# EAGLE board SparkFun_Qwiic_Barometer_LPS28DFW-Panel (EAGLE 9.6.2), part 1 of 3
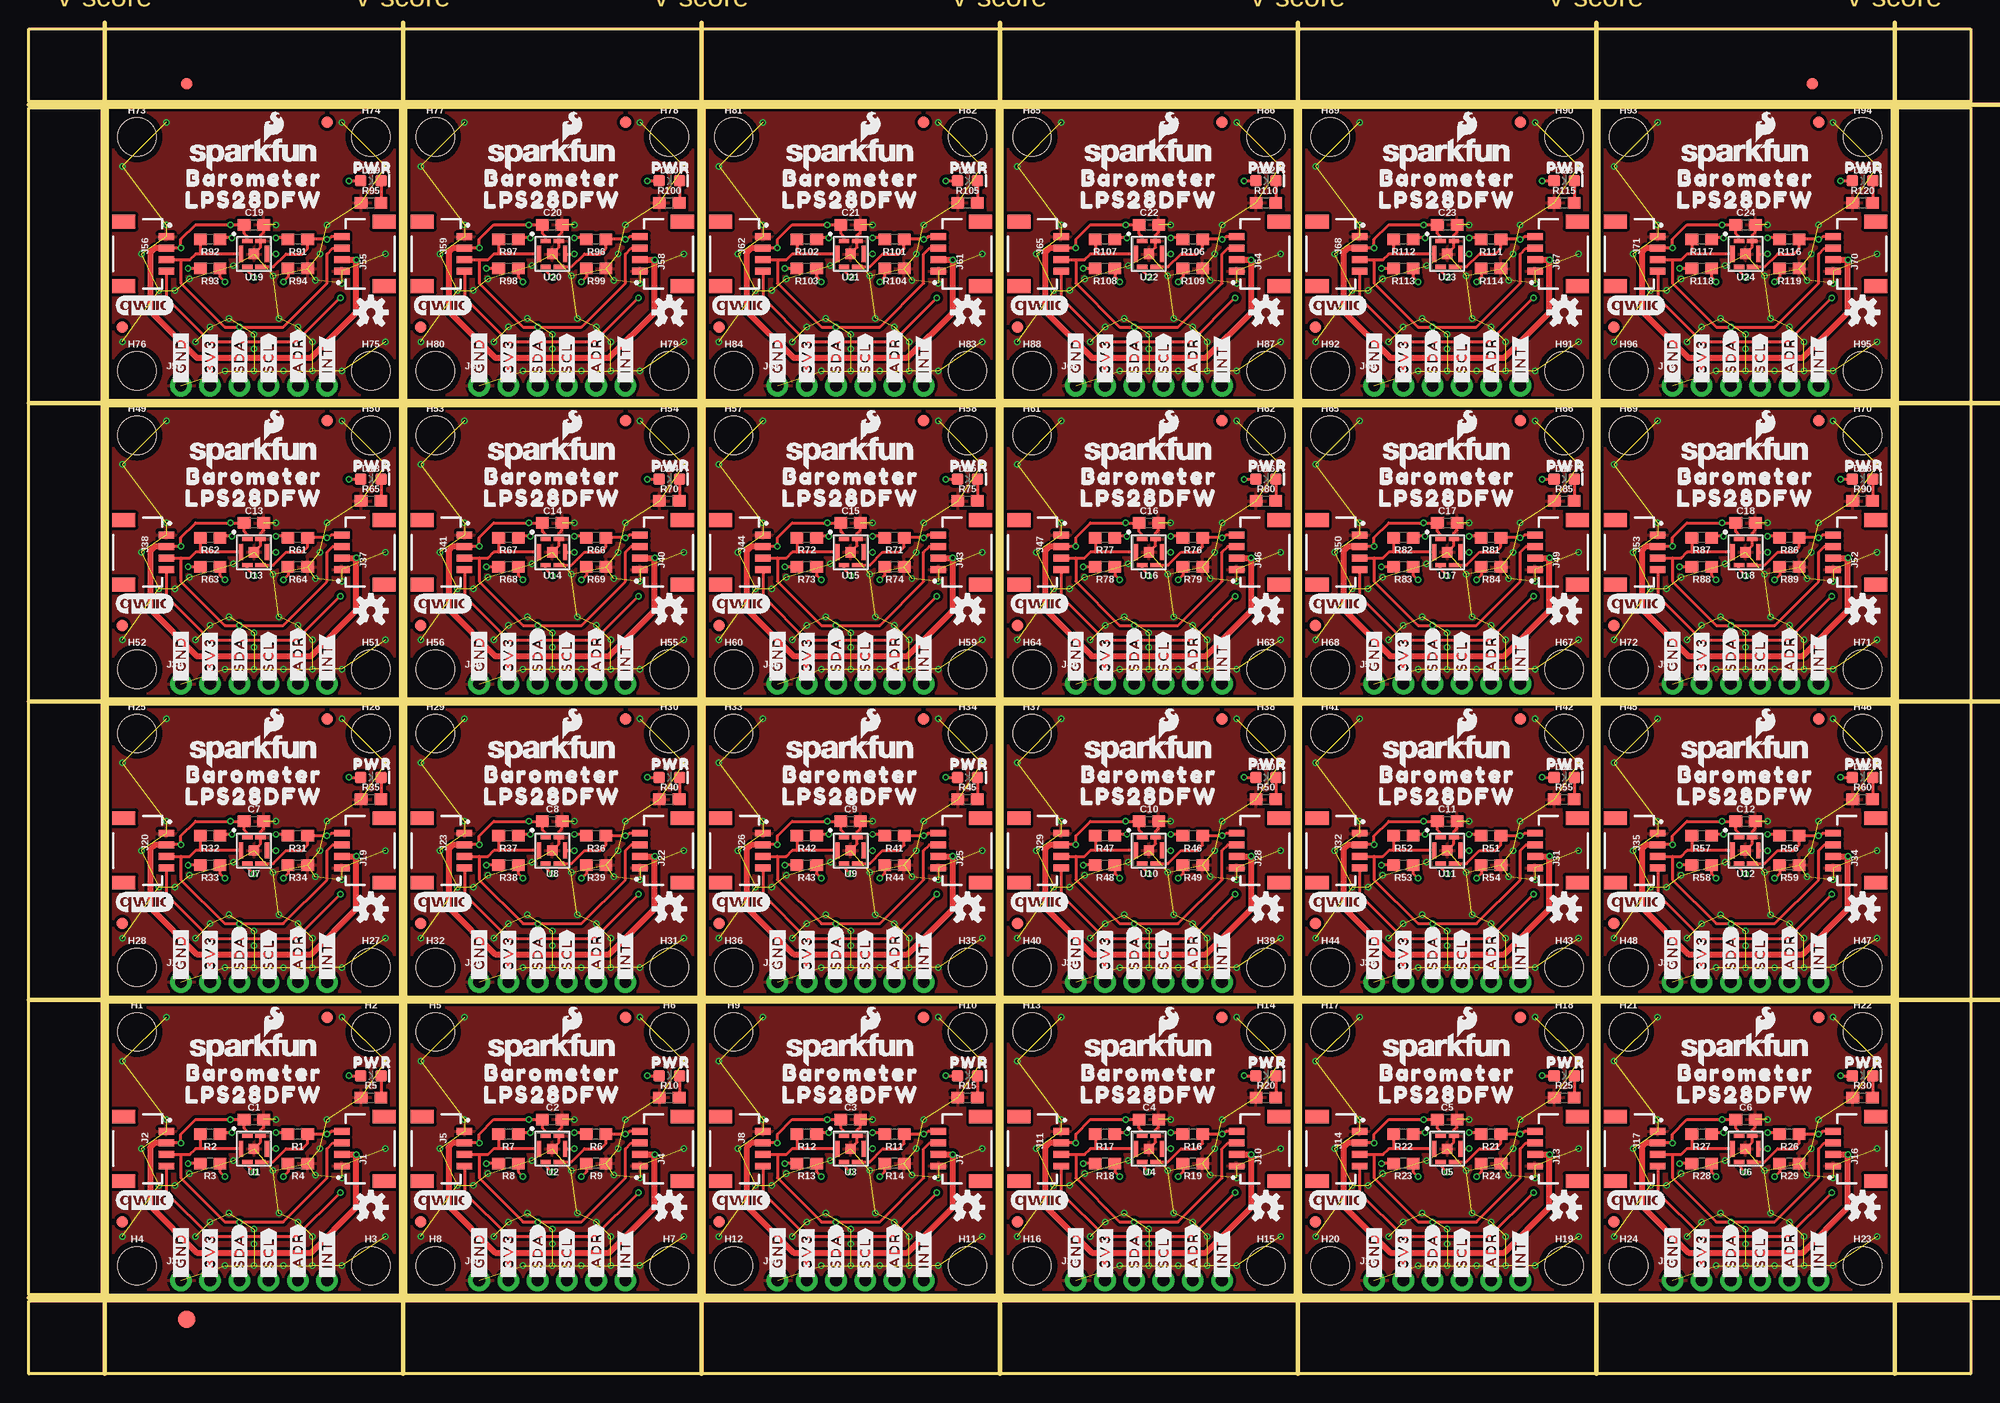
[diagram p0: board, top side]
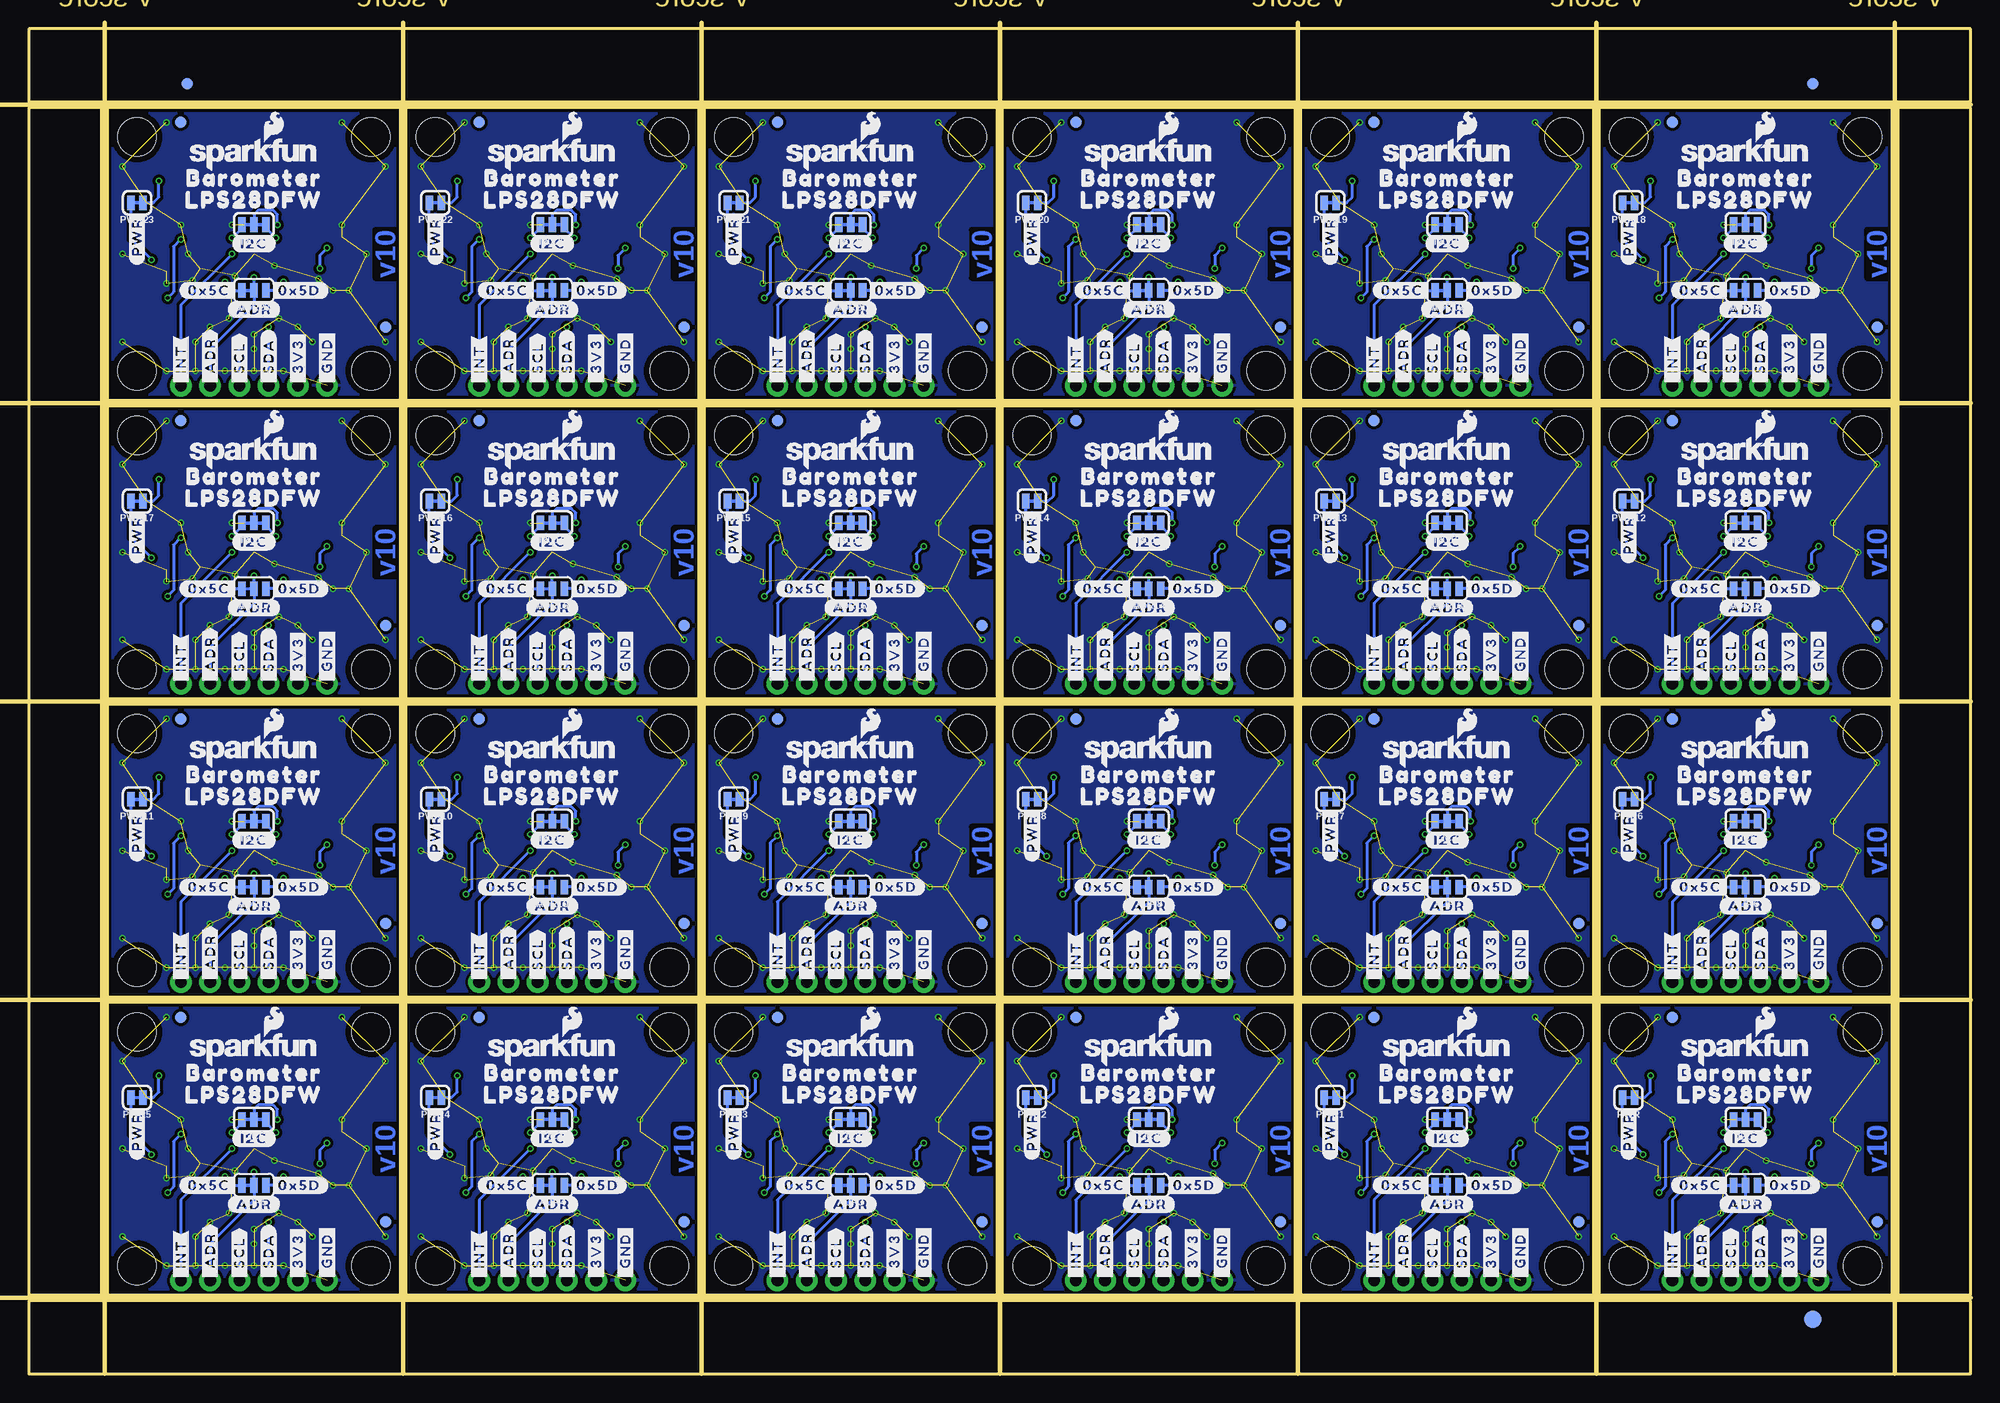
[diagram p1: board, bottom side, seen from below]

Size 168.66 x 116.84 mm. Coordinates in mm from the lower left corner, seen from the top.
Outline: 6.86,6.86 32.26,6.86 32.26,32.26 6.86,32.26 6.86,6.86
Outline: 32.77,6.86 58.17,6.86 58.17,32.26 32.77,32.26 32.77,6.86
Outline: 58.67,6.86 84.07,6.86 84.07,32.26 58.67,32.26 58.67,6.86
Outline: 84.58,6.86 109.98,6.86 109.98,32.26 84.58,32.26 84.58,6.86
Outline: 110.49,6.86 135.89,6.86 135.89,32.26 110.49,32.26 110.49,6.86
Outline: 136.4,6.86 161.8,6.86 161.8,32.26 136.4,32.26 136.4,6.86
Outline: 6.86,32.77 32.26,32.77 32.26,58.17 6.86,58.17 6.86,32.77
Outline: 32.77,32.77 58.17,32.77 58.17,58.17 32.77,58.17 32.77,32.77
Outline: 58.67,32.77 84.07,32.77 84.07,58.17 58.67,58.17 58.67,32.77
Outline: 84.58,32.77 109.98,32.77 109.98,58.17 84.58,58.17 84.58,32.77
Outline: 110.49,32.77 135.89,32.77 135.89,58.17 110.49,58.17 110.49,32.77
Outline: 136.4,32.77 161.8,32.77 161.8,58.17 136.4,58.17 136.4,32.77
Outline: 6.86,58.67 32.26,58.67 32.26,84.07 6.86,84.07 6.86,58.67
Outline: 32.77,58.67 58.17,58.67 58.17,84.07 32.77,84.07 32.77,58.67
Outline: 58.67,58.67 84.07,58.67 84.07,84.07 58.67,84.07 58.67,58.67
Outline: 84.58,58.67 109.98,58.67 109.98,84.07 84.58,84.07 84.58,58.67
Outline: 110.49,58.67 135.89,58.67 135.89,84.07 110.49,84.07 110.49,58.67
Outline: 136.4,58.67 161.8,58.67 161.8,84.07 136.4,84.07 136.4,58.67
Outline: 6.86,84.58 32.26,84.58 32.26,109.98 6.86,109.98 6.86,84.58
Outline: 32.77,84.58 58.17,84.58 58.17,109.98 32.77,109.98 32.77,84.58
Outline: 58.67,84.58 84.07,84.58 84.07,109.98 58.67,109.98 58.67,84.58
Outline: 84.58,84.58 109.98,84.58 109.98,109.98 84.58,109.98 84.58,84.58
Outline: 110.49,84.58 135.89,84.58 135.89,109.98 110.49,109.98 110.49,84.58
Outline: 136.4,84.58 161.8,84.58 161.8,109.98 136.4,109.98 136.4,84.58
Outline: 0,6.35 168.66,6.35 168.66,0 0,0 0,6.35
Outline: 162.31,109.98 168.66,109.98 168.66,6.86 162.31,6.86 162.31,109.98
Outline: 0,116.84 168.66,116.84 168.66,110.49 0,110.49 0,116.84
Outline: 0,109.98 6.35,109.98 6.35,6.86 0,6.86 0,109.98
Copper layers (1*16): Top 0.035mm / dielectric 1.5mm / Bottom 0.035mm
Design rules "SparkFun_Qwiic_Barometer_LPS28DFW": minimum track width 5mil, minimum drill 0.3mm, track to track 5mil, track to pad 5mil, pad to pad 5mil, via to via 5mil, smd to smd 5mil, copper to edge 7mil, drill to drill 7mil, minimum pad ring 5mil, minimum via ring 5mil, stop-mask expansion 2.5mil, vias tented up to drill 25mil, thermal gap 10mil
Milling: 12 lines

## Footprints (pad centres in the part's own frame; a part is rotated, then mirrored left to right if it is on the bottom)
SMT-JUMPER_3_1-NC_TRACE_SILK = smd 0.66 x 1.27: 1 -1.041,0; 2 0,0; 3 1.041,0
0603 = smd 1.1 x 1: 1 -0.85,0; 2 0.85,0
LED-0603 = smd 1 x 1: A -0.877,0; C 0.877,0
FIDUCIAL-1X2 = smd 1 x 1: 1 0,0
FIDUCIAL-1.5X3 = smd 1.5 x 1.5: 1 0,0
STAND-OFF = hole 3.302: 0,0
SMT-JUMPER_3_2-NC_TRACE_SILK = smd 0.66 x 1.27: 1 -1.041,0; 2 0,0; 3 1.041,0
JST04_1MM_RA = smd 0.6 x 1.35: 1 -1.5,0; 2 -0.5,0; 3 0.5,0; 4 1.5,0 | smd 1.2 x 2: NC1 2.8,-3.675; NC2 -2.8,-3.675
1X06_NO_SILK = drill 1.016 pad 1.88: 1 0,0; 2 2.54,0; 3 5.08,0; 4 7.62,0; 5 10.16,0; 6 12.7,0
SMT-JUMPER_2_NC_TRACE_SILK = smd 0.66 x 1.27: 1 -0.521,0; 2 0.521,0
LPS28DFW = smd 0.35 x 1.4: 1 1.125,0; 4 -1.125,0 | smd 0.9 x 0.35: 2 0.575,1.125; 3 -0.575,1.125; 5 -0.575,-1.125; 6 0.575,-1.125 | smd 0.9 x 0.9: 7 0,0

## Placement (x,y rotation side)
ADR  JUMPER-SMT_3_1-NC_TRACE_SILK  [SMT-JUMPER_3_1-NC_TRACE_SILK]  19.56,16.38 180 bottom
ADR1  JUMPER-SMT_3_1-NC_TRACE_SILK  [SMT-JUMPER_3_1-NC_TRACE_SILK]  45.47,16.38 180 bottom
ADR2  JUMPER-SMT_3_1-NC_TRACE_SILK  [SMT-JUMPER_3_1-NC_TRACE_SILK]  71.37,16.38 180 bottom
ADR3  JUMPER-SMT_3_1-NC_TRACE_SILK  [SMT-JUMPER_3_1-NC_TRACE_SILK]  97.28,16.38 180 bottom
ADR4  JUMPER-SMT_3_1-NC_TRACE_SILK  [SMT-JUMPER_3_1-NC_TRACE_SILK]  123.19,16.38 180 bottom
ADR5  JUMPER-SMT_3_1-NC_TRACE_SILK  [SMT-JUMPER_3_1-NC_TRACE_SILK]  149.1,16.38 180 bottom
ADR6  JUMPER-SMT_3_1-NC_TRACE_SILK  [SMT-JUMPER_3_1-NC_TRACE_SILK]  19.56,42.29 180 bottom
ADR7  JUMPER-SMT_3_1-NC_TRACE_SILK  [SMT-JUMPER_3_1-NC_TRACE_SILK]  45.47,42.29 180 bottom
ADR8  JUMPER-SMT_3_1-NC_TRACE_SILK  [SMT-JUMPER_3_1-NC_TRACE_SILK]  71.37,42.29 180 bottom
ADR9  JUMPER-SMT_3_1-NC_TRACE_SILK  [SMT-JUMPER_3_1-NC_TRACE_SILK]  97.28,42.29 180 bottom
ADR10  JUMPER-SMT_3_1-NC_TRACE_SILK  [SMT-JUMPER_3_1-NC_TRACE_SILK]  123.19,42.29 180 bottom
ADR11  JUMPER-SMT_3_1-NC_TRACE_SILK  [SMT-JUMPER_3_1-NC_TRACE_SILK]  149.1,42.29 180 bottom
ADR12  JUMPER-SMT_3_1-NC_TRACE_SILK  [SMT-JUMPER_3_1-NC_TRACE_SILK]  19.56,68.2 180 bottom
ADR13  JUMPER-SMT_3_1-NC_TRACE_SILK  [SMT-JUMPER_3_1-NC_TRACE_SILK]  45.47,68.2 180 bottom
ADR14  JUMPER-SMT_3_1-NC_TRACE_SILK  [SMT-JUMPER_3_1-NC_TRACE_SILK]  71.37,68.2 180 bottom
ADR15  JUMPER-SMT_3_1-NC_TRACE_SILK  [SMT-JUMPER_3_1-NC_TRACE_SILK]  97.28,68.2 180 bottom
ADR16  JUMPER-SMT_3_1-NC_TRACE_SILK  [SMT-JUMPER_3_1-NC_TRACE_SILK]  123.19,68.2 180 bottom
ADR17  JUMPER-SMT_3_1-NC_TRACE_SILK  [SMT-JUMPER_3_1-NC_TRACE_SILK]  149.1,68.2 180 bottom
ADR18  JUMPER-SMT_3_1-NC_TRACE_SILK  [SMT-JUMPER_3_1-NC_TRACE_SILK]  19.56,94.11 180 bottom
ADR19  JUMPER-SMT_3_1-NC_TRACE_SILK  [SMT-JUMPER_3_1-NC_TRACE_SILK]  45.47,94.11 180 bottom
ADR20  JUMPER-SMT_3_1-NC_TRACE_SILK  [SMT-JUMPER_3_1-NC_TRACE_SILK]  71.37,94.11 180 bottom
ADR21  JUMPER-SMT_3_1-NC_TRACE_SILK  [SMT-JUMPER_3_1-NC_TRACE_SILK]  97.28,94.11 180 bottom
ADR22  JUMPER-SMT_3_1-NC_TRACE_SILK  [SMT-JUMPER_3_1-NC_TRACE_SILK]  123.19,94.11 180 bottom
ADR23  JUMPER-SMT_3_1-NC_TRACE_SILK  [SMT-JUMPER_3_1-NC_TRACE_SILK]  149.1,94.11 180 bottom
C1  0.1uF  [0603]  19.56,22.1 0 top
C2  0.1uF  [0603]  45.47,22.1 0 top
C3  0.1uF  [0603]  71.37,22.1 0 top
C4  0.1uF  [0603]  97.28,22.1 0 top
C5  0.1uF  [0603]  123.19,22.1 0 top
C6  0.1uF  [0603]  149.1,22.1 0 top
C7  0.1uF  [0603]  19.56,48.01 0 top
C8  0.1uF  [0603]  45.47,48.01 0 top
C9  0.1uF  [0603]  71.37,48.01 0 top
C10  0.1uF  [0603]  97.28,48.01 0 top
C11  0.1uF  [0603]  123.19,48.01 0 top
C12  0.1uF  [0603]  149.1,48.01 0 top
C13  0.1uF  [0603]  19.56,73.91 0 top
C14  0.1uF  [0603]  45.47,73.91 0 top
C15  0.1uF  [0603]  71.37,73.91 0 top
C16  0.1uF  [0603]  97.28,73.91 0 top
C17  0.1uF  [0603]  123.19,73.91 0 top
C18  0.1uF  [0603]  149.1,73.91 0 top
C19  0.1uF  [0603]  19.56,99.82 0 top
C20  0.1uF  [0603]  45.47,99.82 0 top
C21  0.1uF  [0603]  71.37,99.82 0 top
C22  0.1uF  [0603]  97.28,99.82 0 top
C23  0.1uF  [0603]  123.19,99.82 0 top
C24  0.1uF  [0603]  149.1,99.82 0 top
D1  RED  [LED-0603]  29.72,25.91 0 top
D2  RED  [LED-0603]  55.63,25.91 0 top
D3  RED  [LED-0603]  81.53,25.91 0 top
D4  RED  [LED-0603]  107.44,25.91 0 top
D5  RED  [LED-0603]  133.35,25.91 0 top
D6  RED  [LED-0603]  159.26,25.91 0 top
D7  RED  [LED-0603]  29.72,51.82 0 top
D8  RED  [LED-0603]  55.63,51.82 0 top
D9  RED  [LED-0603]  81.53,51.82 0 top
D10  RED  [LED-0603]  107.44,51.82 0 top
D11  RED  [LED-0603]  133.35,51.82 0 top
D12  RED  [LED-0603]  159.26,51.82 0 top
D13  RED  [LED-0603]  29.72,77.72 0 top
D14  RED  [LED-0603]  55.63,77.72 0 top
D15  RED  [LED-0603]  81.53,77.72 0 top
D16  RED  [LED-0603]  107.44,77.72 0 top
D17  RED  [LED-0603]  133.35,77.72 0 top
D18  RED  [LED-0603]  159.26,77.72 0 top
D19  RED  [LED-0603]  29.72,103.63 0 top
D20  RED  [LED-0603]  55.63,103.63 0 top
D21  RED  [LED-0603]  81.53,103.63 0 top
D22  RED  [LED-0603]  107.44,103.63 0 top
D23  RED  [LED-0603]  133.35,103.63 0 top
D24  RED  [LED-0603]  159.26,103.63 0 top
E$1  [FIDUCIAL-1X2]  13.72,112.08 0 top
E$2  [FIDUCIAL-1X2]  13.72,112.08 0 bottom
E$3  [FIDUCIAL-1X2]  154.88,112.08 0 top
E$4  [FIDUCIAL-1X2]  154.88,112.08 0 bottom
E$5  [FIDUCIAL-1.5X3]  13.72,4.76 0 top
E$6  [FIDUCIAL-1.5X3]  13.72,4.76 0 bottom
FD1  FIDUCIAL1X2  [FIDUCIAL-1X2]  8.13,13.21 0 bottom
FD2  FIDUCIAL1X2  [FIDUCIAL-1X2]  8.13,13.21 0 top
FD3  FIDUCIAL1X2  [FIDUCIAL-1X2]  25.91,30.99 0 bottom
FD4  FIDUCIAL1X2  [FIDUCIAL-1X2]  25.91,30.99 0 top
FD5  FIDUCIAL1X2  [FIDUCIAL-1X2]  34.04,13.21 0 bottom
FD6  FIDUCIAL1X2  [FIDUCIAL-1X2]  34.04,13.21 0 top
FD7  FIDUCIAL1X2  [FIDUCIAL-1X2]  51.82,30.99 0 bottom
FD8  FIDUCIAL1X2  [FIDUCIAL-1X2]  51.82,30.99 0 top
FD9  FIDUCIAL1X2  [FIDUCIAL-1X2]  59.94,13.21 0 bottom
FD10  FIDUCIAL1X2  [FIDUCIAL-1X2]  59.94,13.21 0 top
FD11  FIDUCIAL1X2  [FIDUCIAL-1X2]  77.72,30.99 0 bottom
FD12  FIDUCIAL1X2  [FIDUCIAL-1X2]  77.72,30.99 0 top
FD13  FIDUCIAL1X2  [FIDUCIAL-1X2]  85.85,13.21 0 bottom
FD14  FIDUCIAL1X2  [FIDUCIAL-1X2]  85.85,13.21 0 top
FD15  FIDUCIAL1X2  [FIDUCIAL-1X2]  103.63,30.99 0 bottom
FD16  FIDUCIAL1X2  [FIDUCIAL-1X2]  103.63,30.99 0 top
FD17  FIDUCIAL1X2  [FIDUCIAL-1X2]  111.76,13.21 0 bottom
FD18  FIDUCIAL1X2  [FIDUCIAL-1X2]  111.76,13.21 0 top
FD19  FIDUCIAL1X2  [FIDUCIAL-1X2]  129.54,30.99 0 bottom
FD20  FIDUCIAL1X2  [FIDUCIAL-1X2]  129.54,30.99 0 top
FD21  FIDUCIAL1X2  [FIDUCIAL-1X2]  137.67,13.21 0 bottom
FD22  FIDUCIAL1X2  [FIDUCIAL-1X2]  137.67,13.21 0 top
FD23  FIDUCIAL1X2  [FIDUCIAL-1X2]  155.45,30.99 0 bottom
FD24  FIDUCIAL1X2  [FIDUCIAL-1X2]  155.45,30.99 0 top
FD25  FIDUCIAL1X2  [FIDUCIAL-1X2]  8.13,39.12 0 bottom
FD26  FIDUCIAL1X2  [FIDUCIAL-1X2]  8.13,39.12 0 top
FD27  FIDUCIAL1X2  [FIDUCIAL-1X2]  25.91,56.9 0 bottom
FD28  FIDUCIAL1X2  [FIDUCIAL-1X2]  25.91,56.9 0 top
FD29  FIDUCIAL1X2  [FIDUCIAL-1X2]  34.04,39.12 0 bottom
FD30  FIDUCIAL1X2  [FIDUCIAL-1X2]  34.04,39.12 0 top
FD31  FIDUCIAL1X2  [FIDUCIAL-1X2]  51.82,56.9 0 bottom
FD32  FIDUCIAL1X2  [FIDUCIAL-1X2]  51.82,56.9 0 top
FD33  FIDUCIAL1X2  [FIDUCIAL-1X2]  59.94,39.12 0 bottom
FD34  FIDUCIAL1X2  [FIDUCIAL-1X2]  59.94,39.12 0 top
FD35  FIDUCIAL1X2  [FIDUCIAL-1X2]  77.72,56.9 0 bottom
FD36  FIDUCIAL1X2  [FIDUCIAL-1X2]  77.72,56.9 0 top
FD37  FIDUCIAL1X2  [FIDUCIAL-1X2]  85.85,39.12 0 bottom
FD38  FIDUCIAL1X2  [FIDUCIAL-1X2]  85.85,39.12 0 top
FD39  FIDUCIAL1X2  [FIDUCIAL-1X2]  103.63,56.9 0 bottom
FD40  FIDUCIAL1X2  [FIDUCIAL-1X2]  103.63,56.9 0 top
FD41  FIDUCIAL1X2  [FIDUCIAL-1X2]  111.76,39.12 0 bottom
FD42  FIDUCIAL1X2  [FIDUCIAL-1X2]  111.76,39.12 0 top
FD43  FIDUCIAL1X2  [FIDUCIAL-1X2]  129.54,56.9 0 bottom
FD44  FIDUCIAL1X2  [FIDUCIAL-1X2]  129.54,56.9 0 top
FD45  FIDUCIAL1X2  [FIDUCIAL-1X2]  137.67,39.12 0 bottom
FD46  FIDUCIAL1X2  [FIDUCIAL-1X2]  137.67,39.12 0 top
FD47  FIDUCIAL1X2  [FIDUCIAL-1X2]  155.45,56.9 0 bottom
FD48  FIDUCIAL1X2  [FIDUCIAL-1X2]  155.45,56.9 0 top
FD49  FIDUCIAL1X2  [FIDUCIAL-1X2]  8.13,65.02 0 bottom
FD50  FIDUCIAL1X2  [FIDUCIAL-1X2]  8.13,65.02 0 top
FD51  FIDUCIAL1X2  [FIDUCIAL-1X2]  25.91,82.8 0 bottom
FD52  FIDUCIAL1X2  [FIDUCIAL-1X2]  25.91,82.8 0 top
FD53  FIDUCIAL1X2  [FIDUCIAL-1X2]  34.04,65.02 0 bottom
FD54  FIDUCIAL1X2  [FIDUCIAL-1X2]  34.04,65.02 0 top
FD55  FIDUCIAL1X2  [FIDUCIAL-1X2]  51.82,82.8 0 bottom
FD56  FIDUCIAL1X2  [FIDUCIAL-1X2]  51.82,82.8 0 top
FD57  FIDUCIAL1X2  [FIDUCIAL-1X2]  59.94,65.02 0 bottom
FD58  FIDUCIAL1X2  [FIDUCIAL-1X2]  59.94,65.02 0 top
FD59  FIDUCIAL1X2  [FIDUCIAL-1X2]  77.72,82.8 0 bottom
FD60  FIDUCIAL1X2  [FIDUCIAL-1X2]  77.72,82.8 0 top
FD61  FIDUCIAL1X2  [FIDUCIAL-1X2]  85.85,65.02 0 bottom
FD62  FIDUCIAL1X2  [FIDUCIAL-1X2]  85.85,65.02 0 top
FD63  FIDUCIAL1X2  [FIDUCIAL-1X2]  103.63,82.8 0 bottom
FD64  FIDUCIAL1X2  [FIDUCIAL-1X2]  103.63,82.8 0 top
FD65  FIDUCIAL1X2  [FIDUCIAL-1X2]  111.76,65.02 0 bottom
FD66  FIDUCIAL1X2  [FIDUCIAL-1X2]  111.76,65.02 0 top
FD67  FIDUCIAL1X2  [FIDUCIAL-1X2]  129.54,82.8 0 bottom
FD68  FIDUCIAL1X2  [FIDUCIAL-1X2]  129.54,82.8 0 top
FD69  FIDUCIAL1X2  [FIDUCIAL-1X2]  137.67,65.02 0 bottom
FD70  FIDUCIAL1X2  [FIDUCIAL-1X2]  137.67,65.02 0 top
FD71  FIDUCIAL1X2  [FIDUCIAL-1X2]  155.45,82.8 0 bottom
FD72  FIDUCIAL1X2  [FIDUCIAL-1X2]  155.45,82.8 0 top
FD73  FIDUCIAL1X2  [FIDUCIAL-1X2]  8.13,90.93 0 bottom
FD74  FIDUCIAL1X2  [FIDUCIAL-1X2]  8.13,90.93 0 top
FD75  FIDUCIAL1X2  [FIDUCIAL-1X2]  25.91,108.71 0 bottom
FD76  FIDUCIAL1X2  [FIDUCIAL-1X2]  25.91,108.71 0 top
FD77  FIDUCIAL1X2  [FIDUCIAL-1X2]  34.04,90.93 0 bottom
FD78  FIDUCIAL1X2  [FIDUCIAL-1X2]  34.04,90.93 0 top
FD79  FIDUCIAL1X2  [FIDUCIAL-1X2]  51.82,108.71 0 bottom
FD80  FIDUCIAL1X2  [FIDUCIAL-1X2]  51.82,108.71 0 top
FD81  FIDUCIAL1X2  [FIDUCIAL-1X2]  59.94,90.93 0 bottom
FD82  FIDUCIAL1X2  [FIDUCIAL-1X2]  59.94,90.93 0 top
FD83  FIDUCIAL1X2  [FIDUCIAL-1X2]  77.72,108.71 0 bottom
FD84  FIDUCIAL1X2  [FIDUCIAL-1X2]  77.72,108.71 0 top
FD85  FIDUCIAL1X2  [FIDUCIAL-1X2]  85.85,90.93 0 bottom
FD86  FIDUCIAL1X2  [FIDUCIAL-1X2]  85.85,90.93 0 top
FD87  FIDUCIAL1X2  [FIDUCIAL-1X2]  103.63,108.71 0 bottom
FD88  FIDUCIAL1X2  [FIDUCIAL-1X2]  103.63,108.71 0 top
FD89  FIDUCIAL1X2  [FIDUCIAL-1X2]  111.76,90.93 0 bottom
FD90  FIDUCIAL1X2  [FIDUCIAL-1X2]  111.76,90.93 0 top
FD91  FIDUCIAL1X2  [FIDUCIAL-1X2]  129.54,108.71 0 bottom
FD92  FIDUCIAL1X2  [FIDUCIAL-1X2]  129.54,108.71 0 top
FD93  FIDUCIAL1X2  [FIDUCIAL-1X2]  137.67,90.93 0 bottom
FD94  FIDUCIAL1X2  [FIDUCIAL-1X2]  137.67,90.93 0 top
FD95  FIDUCIAL1X2  [FIDUCIAL-1X2]  155.45,108.71 0 bottom
FD96  FIDUCIAL1X2  [FIDUCIAL-1X2]  155.45,108.71 0 top
H1  STAND-OFF  [STAND-OFF]  9.4,29.72 0 top
H2  STAND-OFF  [STAND-OFF]  29.72,29.72 0 top
H3  STAND-OFF  [STAND-OFF]  29.72,9.4 0 top
H4  STAND-OFF  [STAND-OFF]  9.4,9.4 0 top
H5  STAND-OFF  [STAND-OFF]  35.31,29.72 0 top
H6  STAND-OFF  [STAND-OFF]  55.63,29.72 0 top
H7  STAND-OFF  [STAND-OFF]  55.63,9.4 0 top
H8  STAND-OFF  [STAND-OFF]  35.31,9.4 0 top
H9  STAND-OFF  [STAND-OFF]  61.21,29.72 0 top
H10  STAND-OFF  [STAND-OFF]  81.53,29.72 0 top
H11  STAND-OFF  [STAND-OFF]  81.53,9.4 0 top
H12  STAND-OFF  [STAND-OFF]  61.21,9.4 0 top
H13  STAND-OFF  [STAND-OFF]  87.12,29.72 0 top
H14  STAND-OFF  [STAND-OFF]  107.44,29.72 0 top
H15  STAND-OFF  [STAND-OFF]  107.44,9.4 0 top
H16  STAND-OFF  [STAND-OFF]  87.12,9.4 0 top
H17  STAND-OFF  [STAND-OFF]  113.03,29.72 0 top
H18  STAND-OFF  [STAND-OFF]  133.35,29.72 0 top
H19  STAND-OFF  [STAND-OFF]  133.35,9.4 0 top
H20  STAND-OFF  [STAND-OFF]  113.03,9.4 0 top
H21  STAND-OFF  [STAND-OFF]  138.94,29.72 0 top
H22  STAND-OFF  [STAND-OFF]  159.26,29.72 0 top
H23  STAND-OFF  [STAND-OFF]  159.26,9.4 0 top
H24  STAND-OFF  [STAND-OFF]  138.94,9.4 0 top
H25  STAND-OFF  [STAND-OFF]  9.4,55.63 0 top
H26  STAND-OFF  [STAND-OFF]  29.72,55.63 0 top
H27  STAND-OFF  [STAND-OFF]  29.72,35.31 0 top
H28  STAND-OFF  [STAND-OFF]  9.4,35.31 0 top
H29  STAND-OFF  [STAND-OFF]  35.31,55.63 0 top
H30  STAND-OFF  [STAND-OFF]  55.63,55.63 0 top
H31  STAND-OFF  [STAND-OFF]  55.63,35.31 0 top
H32  STAND-OFF  [STAND-OFF]  35.31,35.31 0 top
H33  STAND-OFF  [STAND-OFF]  61.21,55.63 0 top
H34  STAND-OFF  [STAND-OFF]  81.53,55.63 0 top
H35  STAND-OFF  [STAND-OFF]  81.53,35.31 0 top
H36  STAND-OFF  [STAND-OFF]  61.21,35.31 0 top
H37  STAND-OFF  [STAND-OFF]  87.12,55.63 0 top
H38  STAND-OFF  [STAND-OFF]  107.44,55.63 0 top
H39  STAND-OFF  [STAND-OFF]  107.44,35.31 0 top
H40  STAND-OFF  [STAND-OFF]  87.12,35.31 0 top
H41  STAND-OFF  [STAND-OFF]  113.03,55.63 0 top
H42  STAND-OFF  [STAND-OFF]  133.35,55.63 0 top
H43  STAND-OFF  [STAND-OFF]  133.35,35.31 0 top
H44  STAND-OFF  [STAND-OFF]  113.03,35.31 0 top
H45  STAND-OFF  [STAND-OFF]  138.94,55.63 0 top
H46  STAND-OFF  [STAND-OFF]  159.26,55.63 0 top
H47  STAND-OFF  [STAND-OFF]  159.26,35.31 0 top
H48  STAND-OFF  [STAND-OFF]  138.94,35.31 0 top
H49  STAND-OFF  [STAND-OFF]  9.4,81.53 0 top
H50  STAND-OFF  [STAND-OFF]  29.72,81.53 0 top
H51  STAND-OFF  [STAND-OFF]  29.72,61.21 0 top
H52  STAND-OFF  [STAND-OFF]  9.4,61.21 0 top
H53  STAND-OFF  [STAND-OFF]  35.31,81.53 0 top
H54  STAND-OFF  [STAND-OFF]  55.63,81.53 0 top
H55  STAND-OFF  [STAND-OFF]  55.63,61.21 0 top
H56  STAND-OFF  [STAND-OFF]  35.31,61.21 0 top
H57  STAND-OFF  [STAND-OFF]  61.21,81.53 0 top
H58  STAND-OFF  [STAND-OFF]  81.53,81.53 0 top
H59  STAND-OFF  [STAND-OFF]  81.53,61.21 0 top
H60  STAND-OFF  [STAND-OFF]  61.21,61.21 0 top
H61  STAND-OFF  [STAND-OFF]  87.12,81.53 0 top
H62  STAND-OFF  [STAND-OFF]  107.44,81.53 0 top
H63  STAND-OFF  [STAND-OFF]  107.44,61.21 0 top
H64  STAND-OFF  [STAND-OFF]  87.12,61.21 0 top
H65  STAND-OFF  [STAND-OFF]  113.03,81.53 0 top
H66  STAND-OFF  [STAND-OFF]  133.35,81.53 0 top
H67  STAND-OFF  [STAND-OFF]  133.35,61.21 0 top
H68  STAND-OFF  [STAND-OFF]  113.03,61.21 0 top
H69  STAND-OFF  [STAND-OFF]  138.94,81.53 0 top
H70  STAND-OFF  [STAND-OFF]  159.26,81.53 0 top
H71  STAND-OFF  [STAND-OFF]  159.26,61.21 0 top
H72  STAND-OFF  [STAND-OFF]  138.94,61.21 0 top
H73  STAND-OFF  [STAND-OFF]  9.4,107.44 0 top
H74  STAND-OFF  [STAND-OFF]  29.72,107.44 0 top
H75  STAND-OFF  [STAND-OFF]  29.72,87.12 0 top
H76  STAND-OFF  [STAND-OFF]  9.4,87.12 0 top
H77  STAND-OFF  [STAND-OFF]  35.31,107.44 0 top
H78  STAND-OFF  [STAND-OFF]  55.63,107.44 0 top
H79  STAND-OFF  [STAND-OFF]  55.63,87.12 0 top
H80  STAND-OFF  [STAND-OFF]  35.31,87.12 0 top
H81  STAND-OFF  [STAND-OFF]  61.21,107.44 0 top
H82  STAND-OFF  [STAND-OFF]  81.53,107.44 0 top
H83  STAND-OFF  [STAND-OFF]  81.53,87.12 0 top
H84  STAND-OFF  [STAND-OFF]  61.21,87.12 0 top
H85  STAND-OFF  [STAND-OFF]  87.12,107.44 0 top
H86  STAND-OFF  [STAND-OFF]  107.44,107.44 0 top
H87  STAND-OFF  [STAND-OFF]  107.44,87.12 0 top
H88  STAND-OFF  [STAND-OFF]  87.12,87.12 0 top
H89  STAND-OFF  [STAND-OFF]  113.03,107.44 0 top
H90  STAND-OFF  [STAND-OFF]  133.35,107.44 0 top
H91  STAND-OFF  [STAND-OFF]  133.35,87.12 0 top
H92  STAND-OFF  [STAND-OFF]  113.03,87.12 0 top
H93  STAND-OFF  [STAND-OFF]  138.94,107.44 0 top
H94  STAND-OFF  [STAND-OFF]  159.26,107.44 0 top
H95  STAND-OFF  [STAND-OFF]  159.26,87.12 0 top
H96  STAND-OFF  [STAND-OFF]  138.94,87.12 0 top
I2C  JUMPER-SMT_3_2-NC_TRACE_SILK  [SMT-JUMPER_3_2-NC_TRACE_SILK]  19.56,22.1 180 bottom
I2C1  JUMPER-SMT_3_2-NC_TRACE_SILK  [SMT-JUMPER_3_2-NC_TRACE_SILK]  45.47,22.1 180 bottom
I2C2  JUMPER-SMT_3_2-NC_TRACE_SILK  [SMT-JUMPER_3_2-NC_TRACE_SILK]  71.37,22.1 180 bottom
I2C3  JUMPER-SMT_3_2-NC_TRACE_SILK  [SMT-JUMPER_3_2-NC_TRACE_SILK]  97.28,22.1 180 bottom
I2C4  JUMPER-SMT_3_2-NC_TRACE_SILK  [SMT-JUMPER_3_2-NC_TRACE_SILK]  123.19,22.1 180 bottom
I2C5  JUMPER-SMT_3_2-NC_TRACE_SILK  [SMT-JUMPER_3_2-NC_TRACE_SILK]  149.1,22.1 180 bottom
I2C6  JUMPER-SMT_3_2-NC_TRACE_SILK  [SMT-JUMPER_3_2-NC_TRACE_SILK]  19.56,48.01 180 bottom
I2C7  JUMPER-SMT_3_2-NC_TRACE_SILK  [SMT-JUMPER_3_2-NC_TRACE_SILK]  45.47,48.01 180 bottom
I2C8  JUMPER-SMT_3_2-NC_TRACE_SILK  [SMT-JUMPER_3_2-NC_TRACE_SILK]  71.37,48.01 180 bottom
I2C9  JUMPER-SMT_3_2-NC_TRACE_SILK  [SMT-JUMPER_3_2-NC_TRACE_SILK]  97.28,48.01 180 bottom
I2C10  JUMPER-SMT_3_2-NC_TRACE_SILK  [SMT-JUMPER_3_2-NC_TRACE_SILK]  123.19,48.01 180 bottom
I2C11  JUMPER-SMT_3_2-NC_TRACE_SILK  [SMT-JUMPER_3_2-NC_TRACE_SILK]  149.1,48.01 180 bottom
I2C12  JUMPER-SMT_3_2-NC_TRACE_SILK  [SMT-JUMPER_3_2-NC_TRACE_SILK]  19.56,73.91 180 bottom
I2C13  JUMPER-SMT_3_2-NC_TRACE_SILK  [SMT-JUMPER_3_2-NC_TRACE_SILK]  45.47,73.91 180 bottom
I2C14  JUMPER-SMT_3_2-NC_TRACE_SILK  [SMT-JUMPER_3_2-NC_TRACE_SILK]  71.37,73.91 180 bottom
I2C15  JUMPER-SMT_3_2-NC_TRACE_SILK  [SMT-JUMPER_3_2-NC_TRACE_SILK]  97.28,73.91 180 bottom
I2C16  JUMPER-SMT_3_2-NC_TRACE_SILK  [SMT-JUMPER_3_2-NC_TRACE_SILK]  123.19,73.91 180 bottom
I2C17  JUMPER-SMT_3_2-NC_TRACE_SILK  [SMT-JUMPER_3_2-NC_TRACE_SILK]  149.1,73.91 180 bottom
I2C18  JUMPER-SMT_3_2-NC_TRACE_SILK  [SMT-JUMPER_3_2-NC_TRACE_SILK]  19.56,99.82 180 bottom
I2C19  JUMPER-SMT_3_2-NC_TRACE_SILK  [SMT-JUMPER_3_2-NC_TRACE_SILK]  45.47,99.82 180 bottom
I2C20  JUMPER-SMT_3_2-NC_TRACE_SILK  [SMT-JUMPER_3_2-NC_TRACE_SILK]  71.37,99.82 180 bottom
I2C21  JUMPER-SMT_3_2-NC_TRACE_SILK  [SMT-JUMPER_3_2-NC_TRACE_SILK]  97.28,99.82 180 bottom
I2C22  JUMPER-SMT_3_2-NC_TRACE_SILK  [SMT-JUMPER_3_2-NC_TRACE_SILK]  123.19,99.82 180 bottom
I2C23  JUMPER-SMT_3_2-NC_TRACE_SILK  [SMT-JUMPER_3_2-NC_TRACE_SILK]  149.1,99.82 180 bottom
J1  QWIIC_RIGHT_ANGLE  [JST04_1MM_RA]  27.18,19.56 90 top
J2  QWIIC_RIGHT_ANGLE  [JST04_1MM_RA]  11.94,19.56 270 top
J3  [1X06_NO_SILK]  13.21,8.13 0 top
J4  QWIIC_RIGHT_ANGLE  [JST04_1MM_RA]  53.09,19.56 90 top
J5  QWIIC_RIGHT_ANGLE  [JST04_1MM_RA]  37.85,19.56 270 top
J6  [1X06_NO_SILK]  39.12,8.13 0 top
J7  QWIIC_RIGHT_ANGLE  [JST04_1MM_RA]  78.99,19.56 90 top
J8  QWIIC_RIGHT_ANGLE  [JST04_1MM_RA]  63.75,19.56 270 top
J9  [1X06_NO_SILK]  65.02,8.13 0 top
J10  QWIIC_RIGHT_ANGLE  [JST04_1MM_RA]  104.9,19.56 90 top
J11  QWIIC_RIGHT_ANGLE  [JST04_1MM_RA]  89.66,19.56 270 top
J12  [1X06_NO_SILK]  90.93,8.13 0 top
J13  QWIIC_RIGHT_ANGLE  [JST04_1MM_RA]  130.81,19.56 90 top
J14  QWIIC_RIGHT_ANGLE  [JST04_1MM_RA]  115.57,19.56 270 top
J15  [1X06_NO_SILK]  116.84,8.13 0 top
J16  QWIIC_RIGHT_ANGLE  [JST04_1MM_RA]  156.72,19.56 90 top
J17  QWIIC_RIGHT_ANGLE  [JST04_1MM_RA]  141.48,19.56 270 top
J18  [1X06_NO_SILK]  142.75,8.13 0 top
J19  QWIIC_RIGHT_ANGLE  [JST04_1MM_RA]  27.18,45.47 90 top
J20  QWIIC_RIGHT_ANGLE  [JST04_1MM_RA]  11.94,45.47 270 top
J21  [1X06_NO_SILK]  13.21,34.04 0 top
J22  QWIIC_RIGHT_ANGLE  [JST04_1MM_RA]  53.09,45.47 90 top
J23  QWIIC_RIGHT_ANGLE  [JST04_1MM_RA]  37.85,45.47 270 top
J24  [1X06_NO_SILK]  39.12,34.04 0 top
J25  QWIIC_RIGHT_ANGLE  [JST04_1MM_RA]  78.99,45.47 90 top
J26  QWIIC_RIGHT_ANGLE  [JST04_1MM_RA]  63.75,45.47 270 top
J27  [1X06_NO_SILK]  65.02,34.04 0 top
J28  QWIIC_RIGHT_ANGLE  [JST04_1MM_RA]  104.9,45.47 90 top
J29  QWIIC_RIGHT_ANGLE  [JST04_1MM_RA]  89.66,45.47 270 top
J30  [1X06_NO_SILK]  90.93,34.04 0 top
J31  QWIIC_RIGHT_ANGLE  [JST04_1MM_RA]  130.81,45.47 90 top
J32  QWIIC_RIGHT_ANGLE  [JST04_1MM_RA]  115.57,45.47 270 top
J33  [1X06_NO_SILK]  116.84,34.04 0 top
J34  QWIIC_RIGHT_ANGLE  [JST04_1MM_RA]  156.72,45.47 90 top
J35  QWIIC_RIGHT_ANGLE  [JST04_1MM_RA]  141.48,45.47 270 top
J36  [1X06_NO_SILK]  142.75,34.04 0 top
J37  QWIIC_RIGHT_ANGLE  [JST04_1MM_RA]  27.18,71.37 90 top
J38  QWIIC_RIGHT_ANGLE  [JST04_1MM_RA]  11.94,71.37 270 top
J39  [1X06_NO_SILK]  13.21,59.94 0 top
J40  QWIIC_RIGHT_ANGLE  [JST04_1MM_RA]  53.09,71.37 90 top
J41  QWIIC_RIGHT_ANGLE  [JST04_1MM_RA]  37.85,71.37 270 top
J42  [1X06_NO_SILK]  39.12,59.94 0 top
J43  QWIIC_RIGHT_ANGLE  [JST04_1MM_RA]  78.99,71.37 90 top
J44  QWIIC_RIGHT_ANGLE  [JST04_1MM_RA]  63.75,71.37 270 top
J45  [1X06_NO_SILK]  65.02,59.94 0 top
J46  QWIIC_RIGHT_ANGLE  [JST04_1MM_RA]  104.9,71.37 90 top
J47  QWIIC_RIGHT_ANGLE  [JST04_1MM_RA]  89.66,71.37 270 top
J48  [1X06_NO_SILK]  90.93,59.94 0 top
J49  QWIIC_RIGHT_ANGLE  [JST04_1MM_RA]  130.81,71.37 90 top
J50  QWIIC_RIGHT_ANGLE  [JST04_1MM_RA]  115.57,71.37 270 top
J51  [1X06_NO_SILK]  116.84,59.94 0 top
J52  QWIIC_RIGHT_ANGLE  [JST04_1MM_RA]  156.72,71.37 90 top
J53  QWIIC_RIGHT_ANGLE  [JST04_1MM_RA]  141.48,71.37 270 top
J54  [1X06_NO_SILK]  142.75,59.94 0 top
J55  QWIIC_RIGHT_ANGLE  [JST04_1MM_RA]  27.18,97.28 90 top
J56  QWIIC_RIGHT_ANGLE  [JST04_1MM_RA]  11.94,97.28 270 top
J57  [1X06_NO_SILK]  13.21,85.85 0 top
J58  QWIIC_RIGHT_ANGLE  [JST04_1MM_RA]  53.09,97.28 90 top
J59  QWIIC_RIGHT_ANGLE  [JST04_1MM_RA]  37.85,97.28 270 top
J60  [1X06_NO_SILK]  39.12,85.85 0 top
J61  QWIIC_RIGHT_ANGLE  [JST04_1MM_RA]  78.99,97.28 90 top
J62  QWIIC_RIGHT_ANGLE  [JST04_1MM_RA]  63.75,97.28 270 top
J63  [1X06_NO_SILK]  65.02,85.85 0 top
J64  QWIIC_RIGHT_ANGLE  [JST04_1MM_RA]  104.9,97.28 90 top
J65  QWIIC_RIGHT_ANGLE  [JST04_1MM_RA]  89.66,97.28 270 top
J66  [1X06_NO_SILK]  90.93,85.85 0 top
J67  QWIIC_RIGHT_ANGLE  [JST04_1MM_RA]  130.81,97.28 90 top
J68  QWIIC_RIGHT_ANGLE  [JST04_1MM_RA]  115.57,97.28 270 top
J69  [1X06_NO_SILK]  116.84,85.85 0 top
J70  QWIIC_RIGHT_ANGLE  [JST04_1MM_RA]  156.72,97.28 90 top
J71  QWIIC_RIGHT_ANGLE  [JST04_1MM_RA]  141.48,97.28 270 top
J72  [1X06_NO_SILK]  142.75,85.85 0 top
LOGO1  OSHW-LOGOS  [OSHW-LOGO-S]  29.72,14.48 0 top
LOGO2  QWIIC_LOGO_5MM  [QWIIC_5MM]  10.03,15.11 0 top
LOGO3  SFE_LOGO_NAME_FLAME.1_INCH  [SFE_LOGO_NAME_FLAME_.1]  19.56,28.19 0 top
LOGO4  SFE_LOGO_NAME_FLAME.1_INCH  [SFE_LOGO_NAME_FLAME_.1]  19.56,28.19 0 bottom
LOGO5  OSHW-LOGOS  [OSHW-LOGO-S]  55.63,14.48 0 top
LOGO6  QWIIC_LOGO_5MM  [QWIIC_5MM]  35.94,15.11 0 top
LOGO7  SFE_LOGO_NAME_FLAME.1_INCH  [SFE_LOGO_NAME_FLAME_.1]  45.47,28.19 0 top
LOGO8  SFE_LOGO_NAME_FLAME.1_INCH  [SFE_LOGO_NAME_FLAME_.1]  45.47,28.19 0 bottom
LOGO9  OSHW-LOGOS  [OSHW-LOGO-S]  81.53,14.48 0 top
LOGO10  QWIIC_LOGO_5MM  [QWIIC_5MM]  61.85,15.11 0 top
LOGO11  SFE_LOGO_NAME_FLAME.1_INCH  [SFE_LOGO_NAME_FLAME_.1]  71.37,28.19 0 top
LOGO12  SFE_LOGO_NAME_FLAME.1_INCH  [SFE_LOGO_NAME_FLAME_.1]  71.37,28.19 0 bottom
LOGO13  OSHW-LOGOS  [OSHW-LOGO-S]  107.44,14.48 0 top
LOGO14  QWIIC_LOGO_5MM  [QWIIC_5MM]  87.76,15.11 0 top
LOGO15  SFE_LOGO_NAME_FLAME.1_INCH  [SFE_LOGO_NAME_FLAME_.1]  97.28,28.19 0 top
LOGO16  SFE_LOGO_NAME_FLAME.1_INCH  [SFE_LOGO_NAME_FLAME_.1]  97.28,28.19 0 bottom
LOGO17  OSHW-LOGOS  [OSHW-LOGO-S]  133.35,14.48 0 top
LOGO18  QWIIC_LOGO_5MM  [QWIIC_5MM]  113.67,15.11 0 top
LOGO19  SFE_LOGO_NAME_FLAME.1_INCH  [SFE_LOGO_NAME_FLAME_.1]  123.19,28.19 0 top
LOGO20  SFE_LOGO_NAME_FLAME.1_INCH  [SFE_LOGO_NAME_FLAME_.1]  123.19,28.19 0 bottom
LOGO21  OSHW-LOGOS  [OSHW-LOGO-S]  159.26,14.48 0 top
LOGO22  QWIIC_LOGO_5MM  [QWIIC_5MM]  139.57,15.11 0 top
LOGO23  SFE_LOGO_NAME_FLAME.1_INCH  [SFE_LOGO_NAME_FLAME_.1]  149.1,28.19 0 top
LOGO24  SFE_LOGO_NAME_FLAME.1_INCH  [SFE_LOGO_NAME_FLAME_.1]  149.1,28.19 0 bottom
LOGO25  OSHW-LOGOS  [OSHW-LOGO-S]  29.72,40.39 0 top
LOGO26  QWIIC_LOGO_5MM  [QWIIC_5MM]  10.03,41.02 0 top
LOGO27  SFE_LOGO_NAME_FLAME.1_INCH  [SFE_LOGO_NAME_FLAME_.1]  19.56,54.1 0 top
LOGO28  SFE_LOGO_NAME_FLAME.1_INCH  [SFE_LOGO_NAME_FLAME_.1]  19.56,54.1 0 bottom
LOGO29  OSHW-LOGOS  [OSHW-LOGO-S]  55.63,40.39 0 top
LOGO30  QWIIC_LOGO_5MM  [QWIIC_5MM]  35.94,41.02 0 top
LOGO31  SFE_LOGO_NAME_FLAME.1_INCH  [SFE_LOGO_NAME_FLAME_.1]  45.47,54.1 0 top
LOGO32  SFE_LOGO_NAME_FLAME.1_INCH  [SFE_LOGO_NAME_FLAME_.1]  45.47,54.1 0 bottom
LOGO33  OSHW-LOGOS  [OSHW-LOGO-S]  81.53,40.39 0 top
LOGO34  QWIIC_LOGO_5MM  [QWIIC_5MM]  61.85,41.02 0 top
LOGO35  SFE_LOGO_NAME_FLAME.1_INCH  [SFE_LOGO_NAME_FLAME_.1]  71.37,54.1 0 top
LOGO36  SFE_LOGO_NAME_FLAME.1_INCH  [SFE_LOGO_NAME_FLAME_.1]  71.37,54.1 0 bottom
LOGO37  OSHW-LOGOS  [OSHW-LOGO-S]  107.44,40.39 0 top
LOGO38  QWIIC_LOGO_5MM  [QWIIC_5MM]  87.76,41.02 0 top
LOGO39  SFE_LOGO_NAME_FLAME.1_INCH  [SFE_LOGO_NAME_FLAME_.1]  97.28,54.1 0 top
LOGO40  SFE_LOGO_NAME_FLAME.1_INCH  [SFE_LOGO_NAME_FLAME_.1]  97.28,54.1 0 bottom
LOGO41  OSHW-LOGOS  [OSHW-LOGO-S]  133.35,40.39 0 top
LOGO42  QWIIC_LOGO_5MM  [QWIIC_5MM]  113.67,41.02 0 top
LOGO43  SFE_LOGO_NAME_FLAME.1_INCH  [SFE_LOGO_NAME_FLAME_.1]  123.19,54.1 0 top
LOGO44  SFE_LOGO_NAME_FLAME.1_INCH  [SFE_LOGO_NAME_FLAME_.1]  123.19,54.1 0 bottom
LOGO45  OSHW-LOGOS  [OSHW-LOGO-S]  159.26,40.39 0 top
LOGO46  QWIIC_LOGO_5MM  [QWIIC_5MM]  139.57,41.02 0 top
LOGO47  SFE_LOGO_NAME_FLAME.1_INCH  [SFE_LOGO_NAME_FLAME_.1]  149.1,54.1 0 top
LOGO48  SFE_LOGO_NAME_FLAME.1_INCH  [SFE_LOGO_NAME_FLAME_.1]  149.1,54.1 0 bottom
LOGO49  OSHW-LOGOS  [OSHW-LOGO-S]  29.72,66.29 0 top
LOGO50  QWIIC_LOGO_5MM  [QWIIC_5MM]  10.03,66.93 0 top
LOGO51  SFE_LOGO_NAME_FLAME.1_INCH  [SFE_LOGO_NAME_FLAME_.1]  19.56,80.01 0 top
LOGO52  SFE_LOGO_NAME_FLAME.1_INCH  [SFE_LOGO_NAME_FLAME_.1]  19.56,80.01 0 bottom
LOGO53  OSHW-LOGOS  [OSHW-LOGO-S]  55.63,66.29 0 top
LOGO54  QWIIC_LOGO_5MM  [QWIIC_5MM]  35.94,66.93 0 top
LOGO55  SFE_LOGO_NAME_FLAME.1_INCH  [SFE_LOGO_NAME_FLAME_.1]  45.47,80.01 0 top
LOGO56  SFE_LOGO_NAME_FLAME.1_INCH  [SFE_LOGO_NAME_FLAME_.1]  45.47,80.01 0 bottom
LOGO57  OSHW-LOGOS  [OSHW-LOGO-S]  81.53,66.29 0 top
LOGO58  QWIIC_LOGO_5MM  [QWIIC_5MM]  61.85,66.93 0 top
LOGO59  SFE_LOGO_NAME_FLAME.1_INCH  [SFE_LOGO_NAME_FLAME_.1]  71.37,80.01 0 top
LOGO60  SFE_LOGO_NAME_FLAME.1_INCH  [SFE_LOGO_NAME_FLAME_.1]  71.37,80.01 0 bottom
LOGO61  OSHW-LOGOS  [OSHW-LOGO-S]  107.44,66.29 0 top
LOGO62  QWIIC_LOGO_5MM  [QWIIC_5MM]  87.76,66.93 0 top
LOGO63  SFE_LOGO_NAME_FLAME.1_INCH  [SFE_LOGO_NAME_FLAME_.1]  97.28,80.01 0 top
LOGO64  SFE_LOGO_NAME_FLAME.1_INCH  [SFE_LOGO_NAME_FLAME_.1]  97.28,80.01 0 bottom
LOGO65  OSHW-LOGOS  [OSHW-LOGO-S]  133.35,66.29 0 top
LOGO66  QWIIC_LOGO_5MM  [QWIIC_5MM]  113.67,66.93 0 top
LOGO67  SFE_LOGO_NAME_FLAME.1_INCH  [SFE_LOGO_NAME_FLAME_.1]  123.19,80.01 0 top
LOGO68  SFE_LOGO_NAME_FLAME.1_INCH  [SFE_LOGO_NAME_FLAME_.1]  123.19,80.01 0 bottom
LOGO69  OSHW-LOGOS  [OSHW-LOGO-S]  159.26,66.29 0 top
LOGO70  QWIIC_LOGO_5MM  [QWIIC_5MM]  139.57,66.93 0 top
LOGO71  SFE_LOGO_NAME_FLAME.1_INCH  [SFE_LOGO_NAME_FLAME_.1]  149.1,80.01 0 top
LOGO72  SFE_LOGO_NAME_FLAME.1_INCH  [SFE_LOGO_NAME_FLAME_.1]  149.1,80.01 0 bottom
LOGO73  OSHW-LOGOS  [OSHW-LOGO-S]  29.72,92.2 0 top
LOGO74  QWIIC_LOGO_5MM  [QWIIC_5MM]  10.03,92.84 0 top
LOGO75  SFE_LOGO_NAME_FLAME.1_INCH  [SFE_LOGO_NAME_FLAME_.1]  19.56,105.92 0 top
LOGO76  SFE_LOGO_NAME_FLAME.1_INCH  [SFE_LOGO_NAME_FLAME_.1]  19.56,105.92 0 bottom
LOGO77  OSHW-LOGOS  [OSHW-LOGO-S]  55.63,92.2 0 top
LOGO78  QWIIC_LOGO_5MM  [QWIIC_5MM]  35.94,92.84 0 top
LOGO79  SFE_LOGO_NAME_FLAME.1_INCH  [SFE_LOGO_NAME_FLAME_.1]  45.47,105.92 0 top
LOGO80  SFE_LOGO_NAME_FLAME.1_INCH  [SFE_LOGO_NAME_FLAME_.1]  45.47,105.92 0 bottom
LOGO81  OSHW-LOGOS  [OSHW-LOGO-S]  81.53,92.2 0 top
LOGO82  QWIIC_LOGO_5MM  [QWIIC_5MM]  61.85,92.84 0 top
LOGO83  SFE_LOGO_NAME_FLAME.1_INCH  [SFE_LOGO_NAME_FLAME_.1]  71.37,105.92 0 top
LOGO84  SFE_LOGO_NAME_FLAME.1_INCH  [SFE_LOGO_NAME_FLAME_.1]  71.37,105.92 0 bottom
LOGO85  OSHW-LOGOS  [OSHW-LOGO-S]  107.44,92.2 0 top
LOGO86  QWIIC_LOGO_5MM  [QWIIC_5MM]  87.76,92.84 0 top
LOGO87  SFE_LOGO_NAME_FLAME.1_INCH  [SFE_LOGO_NAME_FLAME_.1]  97.28,105.92 0 top
LOGO88  SFE_LOGO_NAME_FLAME.1_INCH  [SFE_LOGO_NAME_FLAME_.1]  97.28,105.92 0 bottom
LOGO89  OSHW-LOGOS  [OSHW-LOGO-S]  133.35,92.2 0 top
LOGO90  QWIIC_LOGO_5MM  [QWIIC_5MM]  113.67,92.84 0 top
LOGO91  SFE_LOGO_NAME_FLAME.1_INCH  [SFE_LOGO_NAME_FLAME_.1]  123.19,105.92 0 top
LOGO92  SFE_LOGO_NAME_FLAME.1_INCH  [SFE_LOGO_NAME_FLAME_.1]  123.19,105.92 0 bottom
LOGO93  OSHW-LOGOS  [OSHW-LOGO-S]  159.26,92.2 0 top
LOGO94  QWIIC_LOGO_5MM  [QWIIC_5MM]  139.57,92.84 0 top
LOGO95  SFE_LOGO_NAME_FLAME.1_INCH  [SFE_LOGO_NAME_FLAME_.1]  149.1,105.92 0 top
LOGO96  SFE_LOGO_NAME_FLAME.1_INCH  [SFE_LOGO_NAME_FLAME_.1]  149.1,105.92 0 bottom
PWR  JUMPER-SMT_2_NC_TRACE_SILK  [SMT-JUMPER_2_NC_TRACE_SILK]  29.72,24 180 bottom
PWR1  JUMPER-SMT_2_NC_TRACE_SILK  [SMT-JUMPER_2_NC_TRACE_SILK]  55.63,24 180 bottom
PWR2  JUMPER-SMT_2_NC_TRACE_SILK  [SMT-JUMPER_2_NC_TRACE_SILK]  81.53,24 180 bottom
PWR3  JUMPER-SMT_2_NC_TRACE_SILK  [SMT-JUMPER_2_NC_TRACE_SILK]  107.44,24 180 bottom
PWR4  JUMPER-SMT_2_NC_TRACE_SILK  [SMT-JUMPER_2_NC_TRACE_SILK]  133.35,24 180 bottom
PWR5  JUMPER-SMT_2_NC_TRACE_SILK  [SMT-JUMPER_2_NC_TRACE_SILK]  159.26,24 180 bottom
PWR6  JUMPER-SMT_2_NC_TRACE_SILK  [SMT-JUMPER_2_NC_TRACE_SILK]  29.72,49.91 180 bottom
PWR7  JUMPER-SMT_2_NC_TRACE_SILK  [SMT-JUMPER_2_NC_TRACE_SILK]  55.63,49.91 180 bottom
PWR8  JUMPER-SMT_2_NC_TRACE_SILK  [SMT-JUMPER_2_NC_TRACE_SILK]  81.53,49.91 180 bottom
PWR9  JUMPER-SMT_2_NC_TRACE_SILK  [SMT-JUMPER_2_NC_TRACE_SILK]  107.44,49.91 180 bottom
PWR10  JUMPER-SMT_2_NC_TRACE_SILK  [SMT-JUMPER_2_NC_TRACE_SILK]  133.35,49.91 180 bottom
PWR11  JUMPER-SMT_2_NC_TRACE_SILK  [SMT-JUMPER_2_NC_TRACE_SILK]  159.26,49.91 180 bottom
PWR12  JUMPER-SMT_2_NC_TRACE_SILK  [SMT-JUMPER_2_NC_TRACE_SILK]  29.72,75.82 180 bottom
PWR13  JUMPER-SMT_2_NC_TRACE_SILK  [SMT-JUMPER_2_NC_TRACE_SILK]  55.63,75.82 180 bottom
PWR14  JUMPER-SMT_2_NC_TRACE_SILK  [SMT-JUMPER_2_NC_TRACE_SILK]  81.53,75.82 180 bottom
PWR15  JUMPER-SMT_2_NC_TRACE_SILK  [SMT-JUMPER_2_NC_TRACE_SILK]  107.44,75.82 180 bottom
PWR16  JUMPER-SMT_2_NC_TRACE_SILK  [SMT-JUMPER_2_NC_TRACE_SILK]  133.35,75.82 180 bottom
PWR17  JUMPER-SMT_2_NC_TRACE_SILK  [SMT-JUMPER_2_NC_TRACE_SILK]  159.26,75.82 180 bottom
PWR18  JUMPER-SMT_2_NC_TRACE_SILK  [SMT-JUMPER_2_NC_TRACE_SILK]  29.72,101.73 180 bottom
PWR19  JUMPER-SMT_2_NC_TRACE_SILK  [SMT-JUMPER_2_NC_TRACE_SILK]  55.63,101.73 180 bottom
PWR20  JUMPER-SMT_2_NC_TRACE_SILK  [SMT-JUMPER_2_NC_TRACE_SILK]  81.53,101.73 180 bottom
PWR21  JUMPER-SMT_2_NC_TRACE_SILK  [SMT-JUMPER_2_NC_TRACE_SILK]  107.44,101.73 180 bottom
PWR22  JUMPER-SMT_2_NC_TRACE_SILK  [SMT-JUMPER_2_NC_TRACE_SILK]  133.35,101.73 180 bottom
PWR23  JUMPER-SMT_2_NC_TRACE_SILK  [SMT-JUMPER_2_NC_TRACE_SILK]  159.26,101.73 180 bottom
R1  2.2k  [0603]  23.37,20.83 180 top
R2  2.2k  [0603]  15.75,20.83 180 top
R3  10k  [0603]  15.75,18.29 180 top
R4  10k  [0603]  23.37,18.29 180 top
R5  1k  [0603]  29.72,24 0 top
R6  2.2k  [0603]  49.28,20.83 180 top
R7  2.2k  [0603]  41.66,20.83 180 top
R8  10k  [0603]  41.66,18.29 180 top
R9  10k  [0603]  49.28,18.29 180 top
R10  1k  [0603]  55.63,24 0 top
R11  2.2k  [0603]  75.18,20.83 180 top
R12  2.2k  [0603]  67.56,20.83 180 top
R13  10k  [0603]  67.56,18.29 180 top
R14  10k  [0603]  75.18,18.29 180 top
R15  1k  [0603]  81.53,24 0 top
R16  2.2k  [0603]  101.09,20.83 180 top
R17  2.2k  [0603]  93.47,20.83 180 top
R18  10k  [0603]  93.47,18.29 180 top
R19  10k  [0603]  101.09,18.29 180 top
R20  1k  [0603]  107.44,24 0 top
R21  2.2k  [0603]  127,20.83 180 top
R22  2.2k  [0603]  119.38,20.83 180 top
R23  10k  [0603]  119.38,18.29 180 top
R24  10k  [0603]  127,18.29 180 top
R25  1k  [0603]  133.35,24 0 top
R26  2.2k  [0603]  152.91,20.83 180 top
R27  2.2k  [0603]  145.29,20.83 180 top
R28  10k  [0603]  145.29,18.29 180 top
R29  10k  [0603]  152.91,18.29 180 top
R30  1k  [0603]  159.26,24 0 top
R31  2.2k  [0603]  23.37,46.74 180 top
R32  2.2k  [0603]  15.75,46.74 180 top
R33  10k  [0603]  15.75,44.2 180 top
R34  10k  [0603]  23.37,44.2 180 top
R35  1k  [0603]  29.72,49.91 0 top
R36  2.2k  [0603]  49.28,46.74 180 top
R37  2.2k  [0603]  41.66,46.74 180 top
R38  10k  [0603]  41.66,44.2 180 top
R39  10k  [0603]  49.28,44.2 180 top
R40  1k  [0603]  55.63,49.91 0 top
R41  2.2k  [0603]  75.18,46.74 180 top
R42  2.2k  [0603]  67.56,46.74 180 top
R43  10k  [0603]  67.56,44.2 180 top
R44  10k  [0603]  75.18,44.2 180 top
R45  1k  [0603]  81.53,49.91 0 top
R46  2.2k  [0603]  101.09,46.74 180 top
R47  2.2k  [0603]  93.47,46.74 180 top
R48  10k  [0603]  93.47,44.2 180 top
R49  10k  [0603]  101.09,44.2 180 top
R50  1k  [0603]  107.44,49.91 0 top
R51  2.2k  [0603]  127,46.74 180 top
R52  2.2k  [0603]  119.38,46.74 180 top
R53  10k  [0603]  119.38,44.2 180 top
R54  10k  [0603]  127,44.2 180 top
R55  1k  [0603]  133.35,49.91 0 top
R56  2.2k  [0603]  152.91,46.74 180 top
R57  2.2k  [0603]  145.29,46.74 180 top
R58  10k  [0603]  145.29,44.2 180 top
R59  10k  [0603]  152.91,44.2 180 top
R60  1k  [0603]  159.26,49.91 0 top
R61  2.2k  [0603]  23.37,72.64 180 top
R62  2.2k  [0603]  15.75,72.64 180 top
R63  10k  [0603]  15.75,70.1 180 top
R64  10k  [0603]  23.37,70.1 180 top
R65  1k  [0603]  29.72,75.82 0 top
R66  2.2k  [0603]  49.28,72.64 180 top
R67  2.2k  [0603]  41.66,72.64 180 top
R68  10k  [0603]  41.66,70.1 180 top
R69  10k  [0603]  49.28,70.1 180 top
R70  1k  [0603]  55.63,75.82 0 top
R71  2.2k  [0603]  75.18,72.64 180 top
R72  2.2k  [0603]  67.56,72.64 180 top
R73  10k  [0603]  67.56,70.1 180 top
R74  10k  [0603]  75.18,70.1 180 top
R75  1k  [0603]  81.53,75.82 0 top
R76  2.2k  [0603]  101.09,72.64 180 top
R77  2.2k  [0603]  93.47,72.64 180 top
R78  10k  [0603]  93.47,70.1 180 top
R79  10k  [0603]  101.09,70.1 180 top
R80  1k  [0603]  107.44,75.82 0 top
R81  2.2k  [0603]  127,72.64 180 top
R82  2.2k  [0603]  119.38,72.64 180 top
R83  10k  [0603]  119.38,70.1 180 top
R84  10k  [0603]  127,70.1 180 top
R85  1k  [0603]  133.35,75.82 0 top
R86  2.2k  [0603]  152.91,72.64 180 top
R87  2.2k  [0603]  145.29,72.64 180 top
R88  10k  [0603]  145.29,70.1 180 top
R89  10k  [0603]  152.91,70.1 180 top
R90  1k  [0603]  159.26,75.82 0 top
R91  2.2k  [0603]  23.37,98.55 180 top
R92  2.2k  [0603]  15.75,98.55 180 top
R93  10k  [0603]  15.75,96.01 180 top
R94  10k  [0603]  23.37,96.01 180 top
R95  1k  [0603]  29.72,101.73 0 top
R96  2.2k  [0603]  49.28,98.55 180 top
R97  2.2k  [0603]  41.66,98.55 180 top
R98  10k  [0603]  41.66,96.01 180 top
R99  10k  [0603]  49.28,96.01 180 top
R100  1k  [0603]  55.63,101.73 0 top
R101  2.2k  [0603]  75.18,98.55 180 top
R102  2.2k  [0603]  67.56,98.55 180 top
R103  10k  [0603]  67.56,96.01 180 top
R104  10k  [0603]  75.18,96.01 180 top
R105  1k  [0603]  81.53,101.73 0 top
R106  2.2k  [0603]  101.09,98.55 180 top
R107  2.2k  [0603]  93.47,98.55 180 top
R108  10k  [0603]  93.47,96.01 180 top
R109  10k  [0603]  101.09,96.01 180 top
R110  1k  [0603]  107.44,101.73 0 top
R111  2.2k  [0603]  127,98.55 180 top
R112  2.2k  [0603]  119.38,98.55 180 top
R113  10k  [0603]  119.38,96.01 180 top
R114  10k  [0603]  127,96.01 180 top
R115  1k  [0603]  133.35,101.73 0 top
R116  2.2k  [0603]  152.91,98.55 180 top
R117  2.2k  [0603]  145.29,98.55 180 top
R118  10k  [0603]  145.29,96.01 180 top
R119  10k  [0603]  152.91,96.01 180 top
R120  1k  [0603]  159.26,101.73 0 top
U1  LPS28DFW  [LPS28DFW]  19.56,19.56 180 top
U2  LPS28DFW  [LPS28DFW]  45.47,19.56 180 top
U3  LPS28DFW  [LPS28DFW]  71.37,19.56 180 top
U4  LPS28DFW  [LPS28DFW]  97.28,19.56 180 top
U5  LPS28DFW  [LPS28DFW]  123.19,19.56 180 top
U6  LPS28DFW  [LPS28DFW]  149.1,19.56 180 top
U7  LPS28DFW  [LPS28DFW]  19.56,45.47 180 top
U8  LPS28DFW  [LPS28DFW]  45.47,45.47 180 top
U9  LPS28DFW  [LPS28DFW]  71.37,45.47 180 top
U10  LPS28DFW  [LPS28DFW]  97.28,45.47 180 top
U11  LPS28DFW  [LPS28DFW]  123.19,45.47 180 top
U12  LPS28DFW  [LPS28DFW]  149.1,45.47 180 top
U13  LPS28DFW  [LPS28DFW]  19.56,71.37 180 top
U14  LPS28DFW  [LPS28DFW]  45.47,71.37 180 top
U15  LPS28DFW  [LPS28DFW]  71.37,71.37 180 top
U16  LPS28DFW  [LPS28DFW]  97.28,71.37 180 top
U17  LPS28DFW  [LPS28DFW]  123.19,71.37 180 top
U18  LPS28DFW  [LPS28DFW]  149.1,71.37 180 top
U19  LPS28DFW  [LPS28DFW]  19.56,97.28 180 top
U20  LPS28DFW  [LPS28DFW]  45.47,97.28 180 top
U21  LPS28DFW  [LPS28DFW]  71.37,97.28 180 top
U22  LPS28DFW  [LPS28DFW]  97.28,97.28 180 top
U23  LPS28DFW  [LPS28DFW]  123.19,97.28 180 top
U24  LPS28DFW  [LPS28DFW]  149.1,97.28 180 top
U$1  [#_GND#0]  13.21,8.13 90 top
U$2  [#_GND#0]  13.21,8.13 90 bottom
U$3  [#_3V3#0]  15.75,8.13 90 top
U$4  [#_3V3#0]  15.75,8.13 90 bottom
U$5  [#_SDA#0]  18.29,8.13 90 top
U$6  [#_SDA#0]  18.29,8.13 90 bottom
U$7  [#_SCL#0]  20.83,8.13 90 top
U$8  [#_SCL#0]  20.83,8.13 90 bottom
U$9  [#I2C#0]  19.56,20.45 0 bottom
U$10  [#ADR#0]  19.56,14.73 0 bottom
U$11  [BAROMETER0]  19.56,26.16 0 top
U$12  [LPS28DFW0]  19.56,24.26 0 top
U$13  [#PWR#0]  29.72,23.37 90 bottom
U$14  [BAROMETER0]  19.56,26.16 0 bottom
U$15  [LPS28DFW0]  19.56,24.26 0 bottom
U$16  [#0X5D#0]  18.16,16.38 0 bottom
U$17  [#0X5C#0]  20.95,16.38 0 bottom
U$18  [PWR0]  29.84,27.05 0 top
U$19  [#_GND#0]  39.12,8.13 90 top
U$20  [#_INT#0]  25.91,8.13 90 top
U$21  [#_INT#0]  25.91,8.13 90 bottom
U$22  [#_ADR#0]  23.37,8.13 90 top
U$23  [#_ADR#0]  23.37,8.13 90 bottom
U$24  [#_GND#0]  39.12,8.13 90 bottom
U$25  [#_3V3#0]  41.66,8.13 90 top
U$26  [#_3V3#0]  41.66,8.13 90 bottom
U$27  [#_SDA#0]  44.2,8.13 90 top
U$28  [#_SDA#0]  44.2,8.13 90 bottom
U$29  [#_SCL#0]  46.74,8.13 90 top
U$30  [#_SCL#0]  46.74,8.13 90 bottom
U$31  [#I2C#0]  45.47,20.45 0 bottom
U$32  [#ADR#0]  45.47,14.73 0 bottom
U$33  [BAROMETER0]  45.47,26.16 0 top
U$34  [LPS28DFW0]  45.47,24.26 0 top
U$35  [#PWR#0]  55.63,23.37 90 bottom
U$36  [BAROMETER0]  45.47,26.16 0 bottom
U$37  [LPS28DFW0]  45.47,24.26 0 bottom
U$38  [#0X5D#0]  44.07,16.38 0 bottom
U$39  [#0X5C#0]  46.86,16.38 0 bottom
U$40  [#_INT#0]  51.82,8.13 90 top
U$41  [#_INT#0]  51.82,8.13 90 bottom
U$42  [#_ADR#0]  49.28,8.13 90 top
U$43  [#_ADR#0]  49.28,8.13 90 bottom
U$44  [PWR0]  55.75,27.05 0 top
U$45  [#_GND#0]  65.02,8.13 90 top
U$46  [#_GND#0]  65.02,8.13 90 bottom
U$47  [#_3V3#0]  67.56,8.13 90 top
U$48  [#_3V3#0]  67.56,8.13 90 bottom
U$49  [#_SDA#0]  70.1,8.13 90 top
U$50  [#_SDA#0]  70.1,8.13 90 bottom
U$51  [#_SCL#0]  72.64,8.13 90 top
U$52  [#_SCL#0]  72.64,8.13 90 bottom
U$53  [#I2C#0]  71.37,20.45 0 bottom
U$54  [#ADR#0]  71.37,14.73 0 bottom
U$55  [BAROMETER0]  71.37,26.16 0 top
U$56  [LPS28DFW0]  71.37,24.26 0 top
U$57  [#PWR#0]  81.53,23.37 90 bottom
U$58  [BAROMETER0]  71.37,26.16 0 bottom
U$59  [LPS28DFW0]  71.37,24.26 0 bottom
U$60  [#0X5D#0]  69.98,16.38 0 bottom
U$61  [#0X5C#0]  72.77,16.38 0 bottom
U$62  [#_INT#0]  77.72,8.13 90 top
U$63  [#_INT#0]  77.72,8.13 90 bottom
U$64  [#_ADR#0]  75.18,8.13 90 top
U$65  [#_ADR#0]  75.18,8.13 90 bottom
U$66  [PWR0]  81.66,27.05 0 top
U$67  [#_GND#0]  90.93,8.13 90 top
U$68  [#_GND#0]  90.93,8.13 90 bottom
U$69  [#_3V3#0]  93.47,8.13 90 top
U$70  [#_3V3#0]  93.47,8.13 90 bottom
U$71  [#_SDA#0]  96.01,8.13 90 top
U$72  [#_SDA#0]  96.01,8.13 90 bottom
U$73  [#_SCL#0]  98.55,8.13 90 top
U$74  [#_SCL#0]  98.55,8.13 90 bottom
U$75  [#I2C#0]  97.28,20.45 0 bottom
U$76  [#ADR#0]  97.28,14.73 0 bottom
U$77  [BAROMETER0]  97.28,26.16 0 top
U$78  [LPS28DFW0]  97.28,24.26 0 top
U$79  [#PWR#0]  107.44,23.37 90 bottom
U$80  [BAROMETER0]  97.28,26.16 0 bottom
U$81  [LPS28DFW0]  97.28,24.26 0 bottom
U$82  [#0X5D#0]  95.89,16.38 0 bottom
U$83  [#0X5C#0]  98.68,16.38 0 bottom
U$84  [#_INT#0]  103.63,8.13 90 top
U$85  [#_INT#0]  103.63,8.13 90 bottom
U$86  [#_ADR#0]  101.09,8.13 90 top
U$87  [#_ADR#0]  101.09,8.13 90 bottom
U$88  [PWR0]  107.57,27.05 0 top
U$89  [#_GND#0]  116.84,8.13 90 top
U$90  [#_GND#0]  116.84,8.13 90 bottom
U$91  [#_3V3#0]  119.38,8.13 90 top
U$92  [#_3V3#0]  119.38,8.13 90 bottom
U$93  [#_SDA#0]  121.92,8.13 90 top
U$94  [#_SDA#0]  121.92,8.13 90 bottom
U$95  [#_SCL#0]  124.46,8.13 90 top
U$96  [#_SCL#0]  124.46,8.13 90 bottom
U$97  [#I2C#0]  123.19,20.45 0 bottom
U$98  [#ADR#0]  123.19,14.73 0 bottom
U$99  [BAROMETER0]  123.19,26.16 0 top
U$100  [LPS28DFW0]  123.19,24.26 0 top
U$101  [#PWR#0]  133.35,23.37 90 bottom
U$102  [BAROMETER0]  123.19,26.16 0 bottom
U$103  [LPS28DFW0]  123.19,24.26 0 bottom
U$104  [#0X5D#0]  121.79,16.38 0 bottom
U$105  [#0X5C#0]  124.59,16.38 0 bottom
U$106  [#_INT#0]  129.54,8.13 90 top
U$107  [#_INT#0]  129.54,8.13 90 bottom
U$108  [#_ADR#0]  127,8.13 90 top
U$109  [#_ADR#0]  127,8.13 90 bottom
U$110  [PWR0]  133.48,27.05 0 top
U$111  [#_GND#0]  142.75,8.13 90 top
U$112  [#_GND#0]  142.75,8.13 90 bottom
U$113  [#_3V3#0]  145.29,8.13 90 top
U$114  [#_3V3#0]  145.29,8.13 90 bottom
U$115  [#_SDA#0]  147.83,8.13 90 top
U$116  [#_SDA#0]  147.83,8.13 90 bottom
U$117  [#_SCL#0]  150.37,8.13 90 top
U$118  [#_SCL#0]  150.37,8.13 90 bottom
U$119  [#I2C#0]  149.1,20.45 0 bottom
U$120  [#ADR#0]  149.1,14.73 0 bottom
U$121  [BAROMETER0]  149.1,26.16 0 top
U$122  [LPS28DFW0]  149.1,24.26 0 top
U$123  [#PWR#0]  159.26,23.37 90 bottom
U$124  [BAROMETER0]  149.1,26.16 0 bottom
U$125  [LPS28DFW0]  149.1,24.26 0 bottom
U$126  [#0X5D#0]  147.7,16.38 0 bottom
U$127  [#0X5C#0]  150.5,16.38 0 bottom
U$128  [#_INT#0]  155.45,8.13 90 top
U$129  [#_INT#0]  155.45,8.13 90 bottom
U$130  [#_ADR#0]  152.91,8.13 90 top
U$131  [#_ADR#0]  152.91,8.13 90 bottom
U$132  [PWR0]  159.38,27.05 0 top
U$133  [#_GND#0]  13.21,34.04 90 top
U$134  [#_GND#0]  13.21,34.04 90 bottom
U$135  [#_3V3#0]  15.75,34.04 90 top
U$136  [#_3V3#0]  15.75,34.04 90 bottom
U$137  [#_SDA#0]  18.29,34.04 90 top
U$138  [#_SDA#0]  18.29,34.04 90 bottom
U$139  [#_SCL#0]  20.83,34.04 90 top
U$140  [#_SCL#0]  20.83,34.04 90 bottom
U$141  [#I2C#0]  19.56,46.35 0 bottom
U$142  [#ADR#0]  19.56,40.64 0 bottom
U$143  [BAROMETER0]  19.56,52.07 0 top
U$144  [LPS28DFW0]  19.56,50.16 0 top
U$145  [#PWR#0]  29.72,49.28 90 bottom
U$146  [BAROMETER0]  19.56,52.07 0 bottom
U$147  [LPS28DFW0]  19.56,50.16 0 bottom
U$148  [#0X5D#0]  18.16,42.29 0 bottom
U$149  [#0X5C#0]  20.95,42.29 0 bottom
U$150  [#_INT#0]  25.91,34.04 90 top
U$151  [#_INT#0]  25.91,34.04 90 bottom
U$152  [#_ADR#0]  23.37,34.04 90 top
U$153  [#_ADR#0]  23.37,34.04 90 bottom
U$154  [PWR0]  29.84,52.96 0 top
U$155  [#_GND#0]  39.12,34.04 90 top
U$156  [#_GND#0]  39.12,34.04 90 bottom
U$157  [#_3V3#0]  41.66,34.04 90 top
U$158  [#_3V3#0]  41.66,34.04 90 bottom
U$159  [#_SDA#0]  44.2,34.04 90 top
U$160  [#_SDA#0]  44.2,34.04 90 bottom
U$161  [#_SCL#0]  46.74,34.04 90 top
U$162  [#_SCL#0]  46.74,34.04 90 bottom
U$163  [#I2C#0]  45.47,46.35 0 bottom
U$164  [#ADR#0]  45.47,40.64 0 bottom
U$165  [BAROMETER0]  45.47,52.07 0 top
U$166  [LPS28DFW0]  45.47,50.16 0 top
U$167  [#PWR#0]  55.63,49.28 90 bottom
U$168  [BAROMETER0]  45.47,52.07 0 bottom
U$169  [LPS28DFW0]  45.47,50.16 0 bottom
U$170  [#0X5D#0]  44.07,42.29 0 bottom
U$171  [#0X5C#0]  46.86,42.29 0 bottom
U$172  [#_INT#0]  51.82,34.04 90 top
U$173  [#_INT#0]  51.82,34.04 90 bottom
U$174  [#_ADR#0]  49.28,34.04 90 top
U$175  [#_ADR#0]  49.28,34.04 90 bottom
U$176  [PWR0]  55.75,52.96 0 top
U$177  [#_GND#0]  65.02,34.04 90 top
U$178  [#_GND#0]  65.02,34.04 90 bottom
U$179  [#_3V3#0]  67.56,34.04 90 top
U$180  [#_3V3#0]  67.56,34.04 90 bottom
U$181  [#_SDA#0]  70.1,34.04 90 top
U$182  [#_SDA#0]  70.1,34.04 90 bottom
U$183  [#_SCL#0]  72.64,34.04 90 top
U$184  [#_SCL#0]  72.64,34.04 90 bottom
U$185  [#I2C#0]  71.37,46.35 0 bottom
U$186  [#ADR#0]  71.37,40.64 0 bottom
U$187  [BAROMETER0]  71.37,52.07 0 top
U$188  [LPS28DFW0]  71.37,50.16 0 top
U$189  [#PWR#0]  81.53,49.28 90 bottom
U$190  [BAROMETER0]  71.37,52.07 0 bottom
U$191  [LPS28DFW0]  71.37,50.16 0 bottom
U$192  [#0X5D#0]  69.98,42.29 0 bottom
U$193  [#0X5C#0]  72.77,42.29 0 bottom
U$194  [#_INT#0]  77.72,34.04 90 top
U$195  [#_INT#0]  77.72,34.04 90 bottom
U$196  [#_ADR#0]  75.18,34.04 90 top
U$197  [#_ADR#0]  75.18,34.04 90 bottom
U$198  [PWR0]  81.66,52.96 0 top
U$199  [#_GND#0]  90.93,34.04 90 top
U$200  [#_GND#0]  90.93,34.04 90 bottom
U$201  [#_3V3#0]  93.47,34.04 90 top
U$202  [#_3V3#0]  93.47,34.04 90 bottom
U$203  [#_SDA#0]  96.01,34.04 90 top
U$204  [#_SDA#0]  96.01,34.04 90 bottom
U$205  [#_SCL#0]  98.55,34.04 90 top
U$206  [#_SCL#0]  98.55,34.04 90 bottom
U$207  [#I2C#0]  97.28,46.35 0 bottom
U$208  [#ADR#0]  97.28,40.64 0 bottom
U$209  [BAROMETER0]  97.28,52.07 0 top
U$210  [LPS28DFW0]  97.28,50.16 0 top
U$211  [#PWR#0]  107.44,49.28 90 bottom
U$212  [BAROMETER0]  97.28,52.07 0 bottom
U$213  [LPS28DFW0]  97.28,50.16 0 bottom
U$214  [#0X5D#0]  95.89,42.29 0 bottom
U$215  [#0X5C#0]  98.68,42.29 0 bottom
U$216  [#_INT#0]  103.63,34.04 90 top
U$217  [#_INT#0]  103.63,34.04 90 bottom
U$218  [#_ADR#0]  101.09,34.04 90 top
U$219  [#_ADR#0]  101.09,34.04 90 bottom
U$220  [PWR0]  107.57,52.96 0 top
U$221  [#_GND#0]  116.84,34.04 90 top
U$222  [#_GND#0]  116.84,34.04 90 bottom
U$223  [#_3V3#0]  119.38,34.04 90 top
U$224  [#_3V3#0]  119.38,34.04 90 bottom
U$225  [#_SDA#0]  121.92,34.04 90 top
U$226  [#_SDA#0]  121.92,34.04 90 bottom
U$227  [#_SCL#0]  124.46,34.04 90 top
U$228  [#_SCL#0]  124.46,34.04 90 bottom
U$229  [#I2C#0]  123.19,46.35 0 bottom
U$230  [#ADR#0]  123.19,40.64 0 bottom
U$231  [BAROMETER0]  123.19,52.07 0 top
U$232  [LPS28DFW0]  123.19,50.16 0 top
U$233  [#PWR#0]  133.35,49.28 90 bottom
U$234  [BAROMETER0]  123.19,52.07 0 bottom
U$235  [LPS28DFW0]  123.19,50.16 0 bottom
U$236  [#0X5D#0]  121.79,42.29 0 bottom
U$237  [#0X5C#0]  124.59,42.29 0 bottom
U$238  [#_INT#0]  129.54,34.04 90 top
U$239  [#_INT#0]  129.54,34.04 90 bottom
U$240  [#_ADR#0]  127,34.04 90 top
U$241  [#_ADR#0]  127,34.04 90 bottom
U$242  [PWR0]  133.48,52.96 0 top
U$243  [#_GND#0]  142.75,34.04 90 top
U$244  [#_GND#0]  142.75,34.04 90 bottom
U$245  [#_3V3#0]  145.29,34.04 90 top
U$246  [#_3V3#0]  145.29,34.04 90 bottom
U$247  [#_SDA#0]  147.83,34.04 90 top
U$248  [#_SDA#0]  147.83,34.04 90 bottom
U$249  [#_SCL#0]  150.37,34.04 90 top
U$250  [#_SCL#0]  150.37,34.04 90 bottom
U$251  [#I2C#0]  149.1,46.35 0 bottom
U$252  [#ADR#0]  149.1,40.64 0 bottom
U$253  [BAROMETER0]  149.1,52.07 0 top
U$254  [LPS28DFW0]  149.1,50.16 0 top
U$255  [#PWR#0]  159.26,49.28 90 bottom
U$256  [BAROMETER0]  149.1,52.07 0 bottom
U$257  [LPS28DFW0]  149.1,50.16 0 bottom
U$258  [#0X5D#0]  147.7,42.29 0 bottom
U$259  [#0X5C#0]  150.5,42.29 0 bottom
U$260  [#_INT#0]  155.45,34.04 90 top
U$261  [#_INT#0]  155.45,34.04 90 bottom
U$262  [#_ADR#0]  152.91,34.04 90 top
U$263  [#_ADR#0]  152.91,34.04 90 bottom
U$264  [PWR0]  159.38,52.96 0 top
U$265  [#_GND#0]  13.21,59.94 90 top
U$266  [#_GND#0]  13.21,59.94 90 bottom
U$267  [#_3V3#0]  15.75,59.94 90 top
U$268  [#_3V3#0]  15.75,59.94 90 bottom
U$269  [#_SDA#0]  18.29,59.94 90 top
U$270  [#_SDA#0]  18.29,59.94 90 bottom
U$271  [#_SCL#0]  20.83,59.94 90 top
U$272  [#_SCL#0]  20.83,59.94 90 bottom
U$273  [#I2C#0]  19.56,72.26 0 bottom
U$274  [#ADR#0]  19.56,66.55 0 bottom
U$275  [BAROMETER0]  19.56,77.98 0 top
U$276  [LPS28DFW0]  19.56,76.07 0 top
U$277  [#PWR#0]  29.72,75.18 90 bottom
U$278  [BAROMETER0]  19.56,77.98 0 bottom
U$279  [LPS28DFW0]  19.56,76.07 0 bottom
U$280  [#0X5D#0]  18.16,68.2 0 bottom
U$281  [#0X5C#0]  20.95,68.2 0 bottom
U$282  [#_INT#0]  25.91,59.94 90 top
U$283  [#_INT#0]  25.91,59.94 90 bottom
U$284  [#_ADR#0]  23.37,59.94 90 top
U$285  [#_ADR#0]  23.37,59.94 90 bottom
U$286  [PWR0]  29.84,78.87 0 top
U$287  [#_GND#0]  39.12,59.94 90 top
U$288  [#_GND#0]  39.12,59.94 90 bottom
U$289  [#_3V3#0]  41.66,59.94 90 top
U$290  [#_3V3#0]  41.66,59.94 90 bottom
U$291  [#_SDA#0]  44.2,59.94 90 top
U$292  [#_SDA#0]  44.2,59.94 90 bottom
U$293  [#_SCL#0]  46.74,59.94 90 top
U$294  [#_SCL#0]  46.74,59.94 90 bottom
U$295  [#I2C#0]  45.47,72.26 0 bottom
U$296  [#ADR#0]  45.47,66.55 0 bottom
U$297  [BAROMETER0]  45.47,77.98 0 top
U$298  [LPS28DFW0]  45.47,76.07 0 top
U$299  [#PWR#0]  55.63,75.18 90 bottom
U$300  [BAROMETER0]  45.47,77.98 0 bottom
U$301  [LPS28DFW0]  45.47,76.07 0 bottom
U$302  [#0X5D#0]  44.07,68.2 0 bottom
U$303  [#0X5C#0]  46.86,68.2 0 bottom
U$304  [#_INT#0]  51.82,59.94 90 top
U$305  [#_INT#0]  51.82,59.94 90 bottom
U$306  [#_ADR#0]  49.28,59.94 90 top
U$307  [#_ADR#0]  49.28,59.94 90 bottom
U$308  [PWR0]  55.75,78.87 0 top
U$309  [#_GND#0]  65.02,59.94 90 top
U$310  [#_GND#0]  65.02,59.94 90 bottom
U$311  [#_3V3#0]  67.56,59.94 90 top
U$312  [#_3V3#0]  67.56,59.94 90 bottom
U$313  [#_SDA#0]  70.1,59.94 90 top
U$314  [#_SDA#0]  70.1,59.94 90 bottom
U$315  [#_SCL#0]  72.64,59.94 90 top
U$316  [#_SCL#0]  72.64,59.94 90 bottom
U$317  [#I2C#0]  71.37,72.26 0 bottom
U$318  [#ADR#0]  71.37,66.55 0 bottom
U$319  [BAROMETER0]  71.37,77.98 0 top
U$320  [LPS28DFW0]  71.37,76.07 0 top
U$321  [#PWR#0]  81.53,75.18 90 bottom
U$322  [BAROMETER0]  71.37,77.98 0 bottom
U$323  [LPS28DFW0]  71.37,76.07 0 bottom
U$324  [#0X5D#0]  69.98,68.2 0 bottom
U$325  [#0X5C#0]  72.77,68.2 0 bottom
U$326  [#_INT#0]  77.72,59.94 90 top
U$327  [#_INT#0]  77.72,59.94 90 bottom
U$328  [#_ADR#0]  75.18,59.94 90 top
U$329  [#_ADR#0]  75.18,59.94 90 bottom
U$330  [PWR0]  81.66,78.87 0 top
U$331  [#_GND#0]  90.93,59.94 90 top
U$332  [#_GND#0]  90.93,59.94 90 bottom
U$333  [#_3V3#0]  93.47,59.94 90 top
U$334  [#_3V3#0]  93.47,59.94 90 bottom
U$335  [#_SDA#0]  96.01,59.94 90 top
U$336  [#_SDA#0]  96.01,59.94 90 bottom
U$337  [#_SCL#0]  98.55,59.94 90 top
U$338  [#_SCL#0]  98.55,59.94 90 bottom
U$339  [#I2C#0]  97.28,72.26 0 bottom
U$340  [#ADR#0]  97.28,66.55 0 bottom
U$341  [BAROMETER0]  97.28,77.98 0 top
U$342  [LPS28DFW0]  97.28,76.07 0 top
U$343  [#PWR#0]  107.44,75.18 90 bottom
U$344  [BAROMETER0]  97.28,77.98 0 bottom
U$345  [LPS28DFW0]  97.28,76.07 0 bottom
U$346  [#0X5D#0]  95.89,68.2 0 bottom
U$347  [#0X5C#0]  98.68,68.2 0 bottom
U$348  [#_INT#0]  103.63,59.94 90 top
U$349  [#_INT#0]  103.63,59.94 90 bottom
U$350  [#_ADR#0]  101.09,59.94 90 top
U$351  [#_ADR#0]  101.09,59.94 90 bottom
U$352  [PWR0]  107.57,78.87 0 top
U$353  [#_GND#0]  116.84,59.94 90 top
U$354  [#_GND#0]  116.84,59.94 90 bottom
U$355  [#_3V3#0]  119.38,59.94 90 top
U$356  [#_3V3#0]  119.38,59.94 90 bottom
U$357  [#_SDA#0]  121.92,59.94 90 top
U$358  [#_SDA#0]  121.92,59.94 90 bottom
U$359  [#_SCL#0]  124.46,59.94 90 top
U$360  [#_SCL#0]  124.46,59.94 90 bottom